# Allegro board PE100_R11_Board_source_file.brd
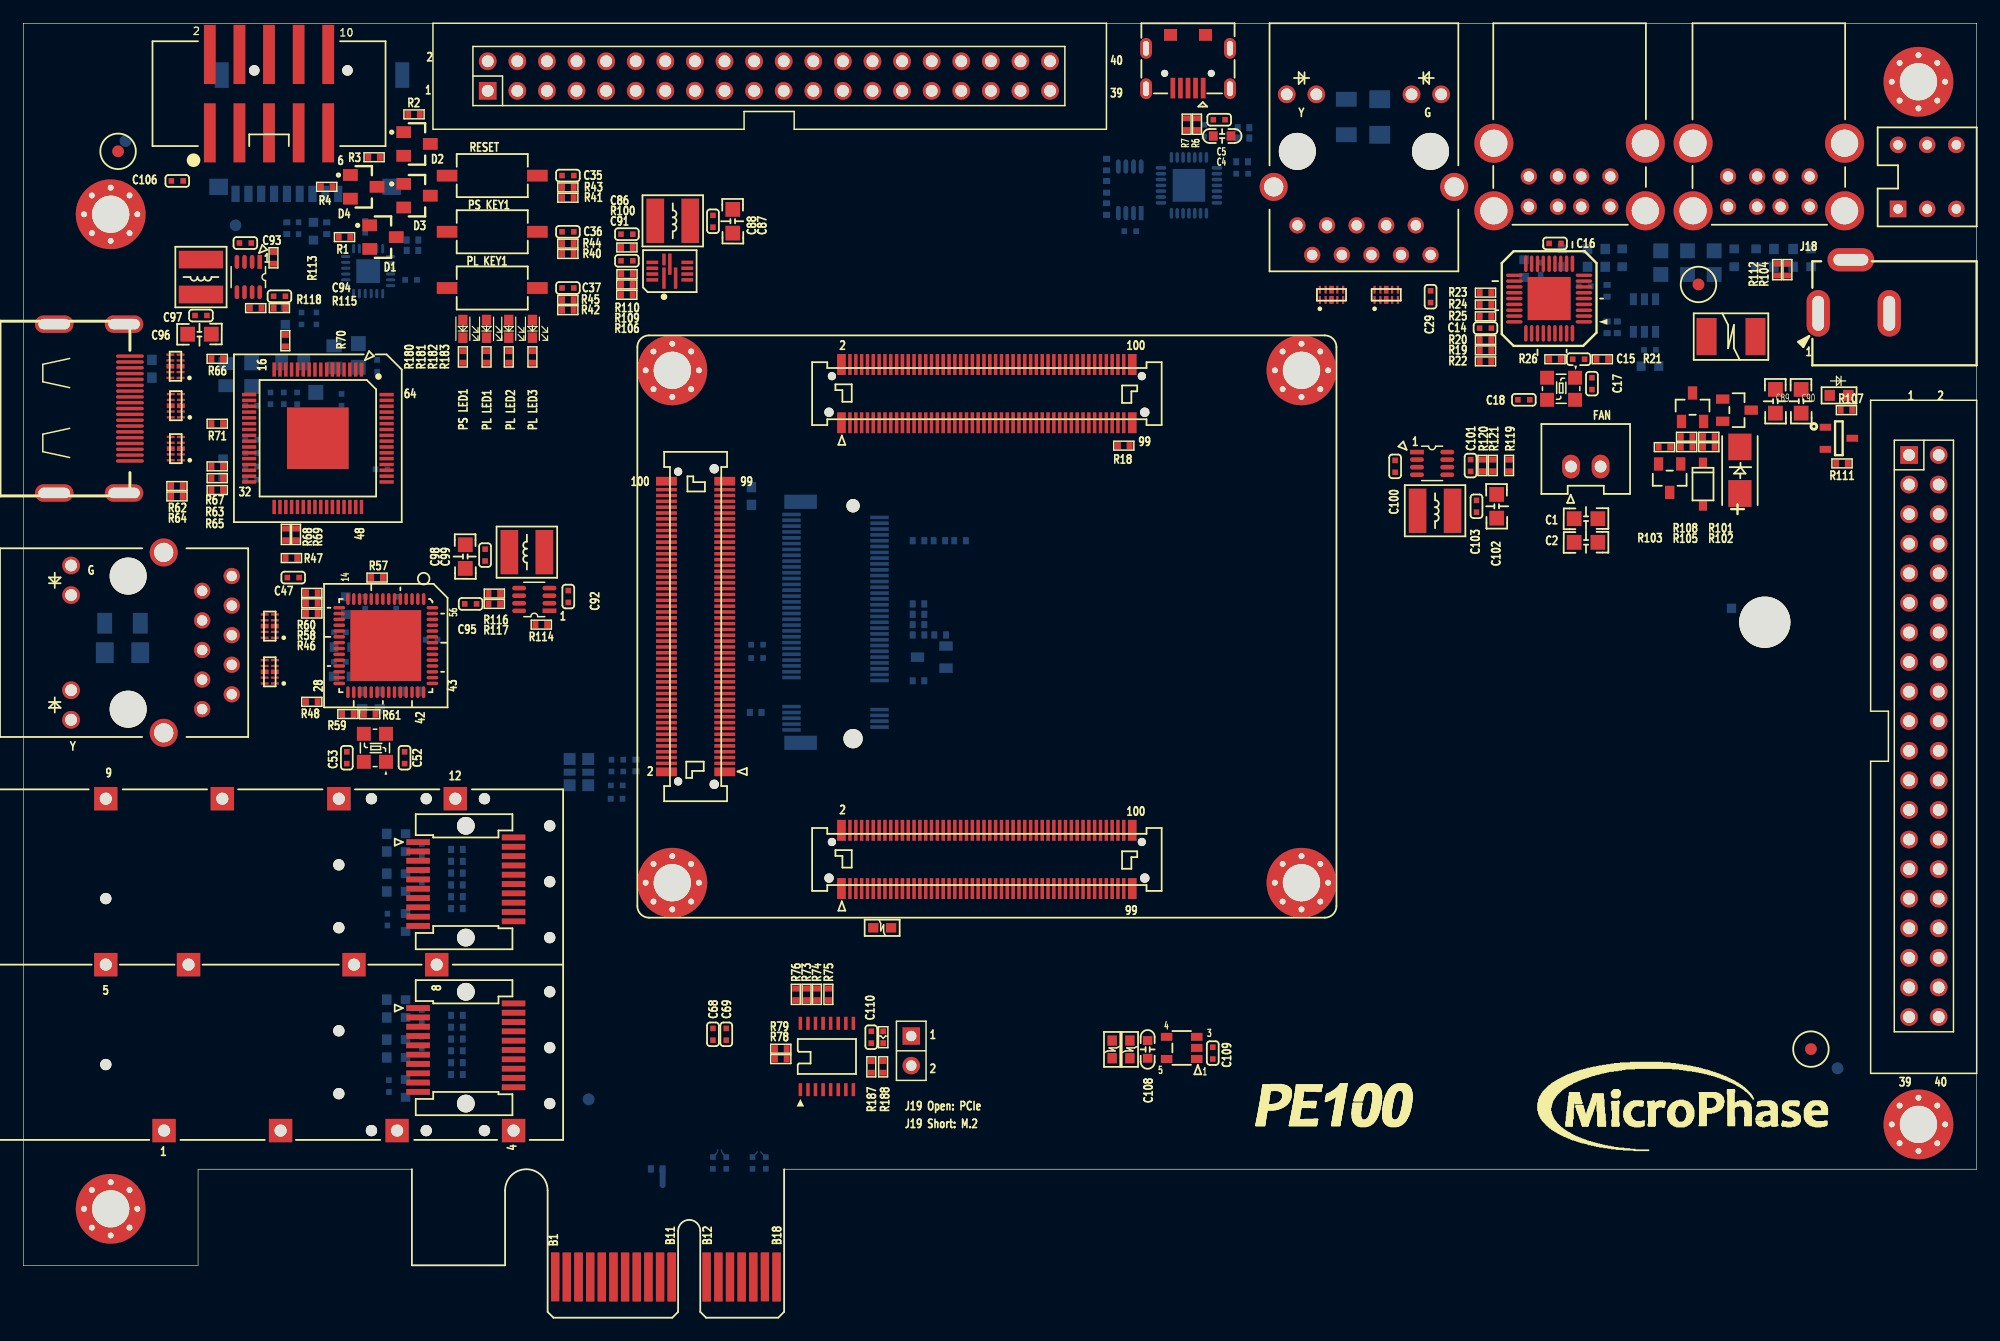
[diagram p0: board, top side]
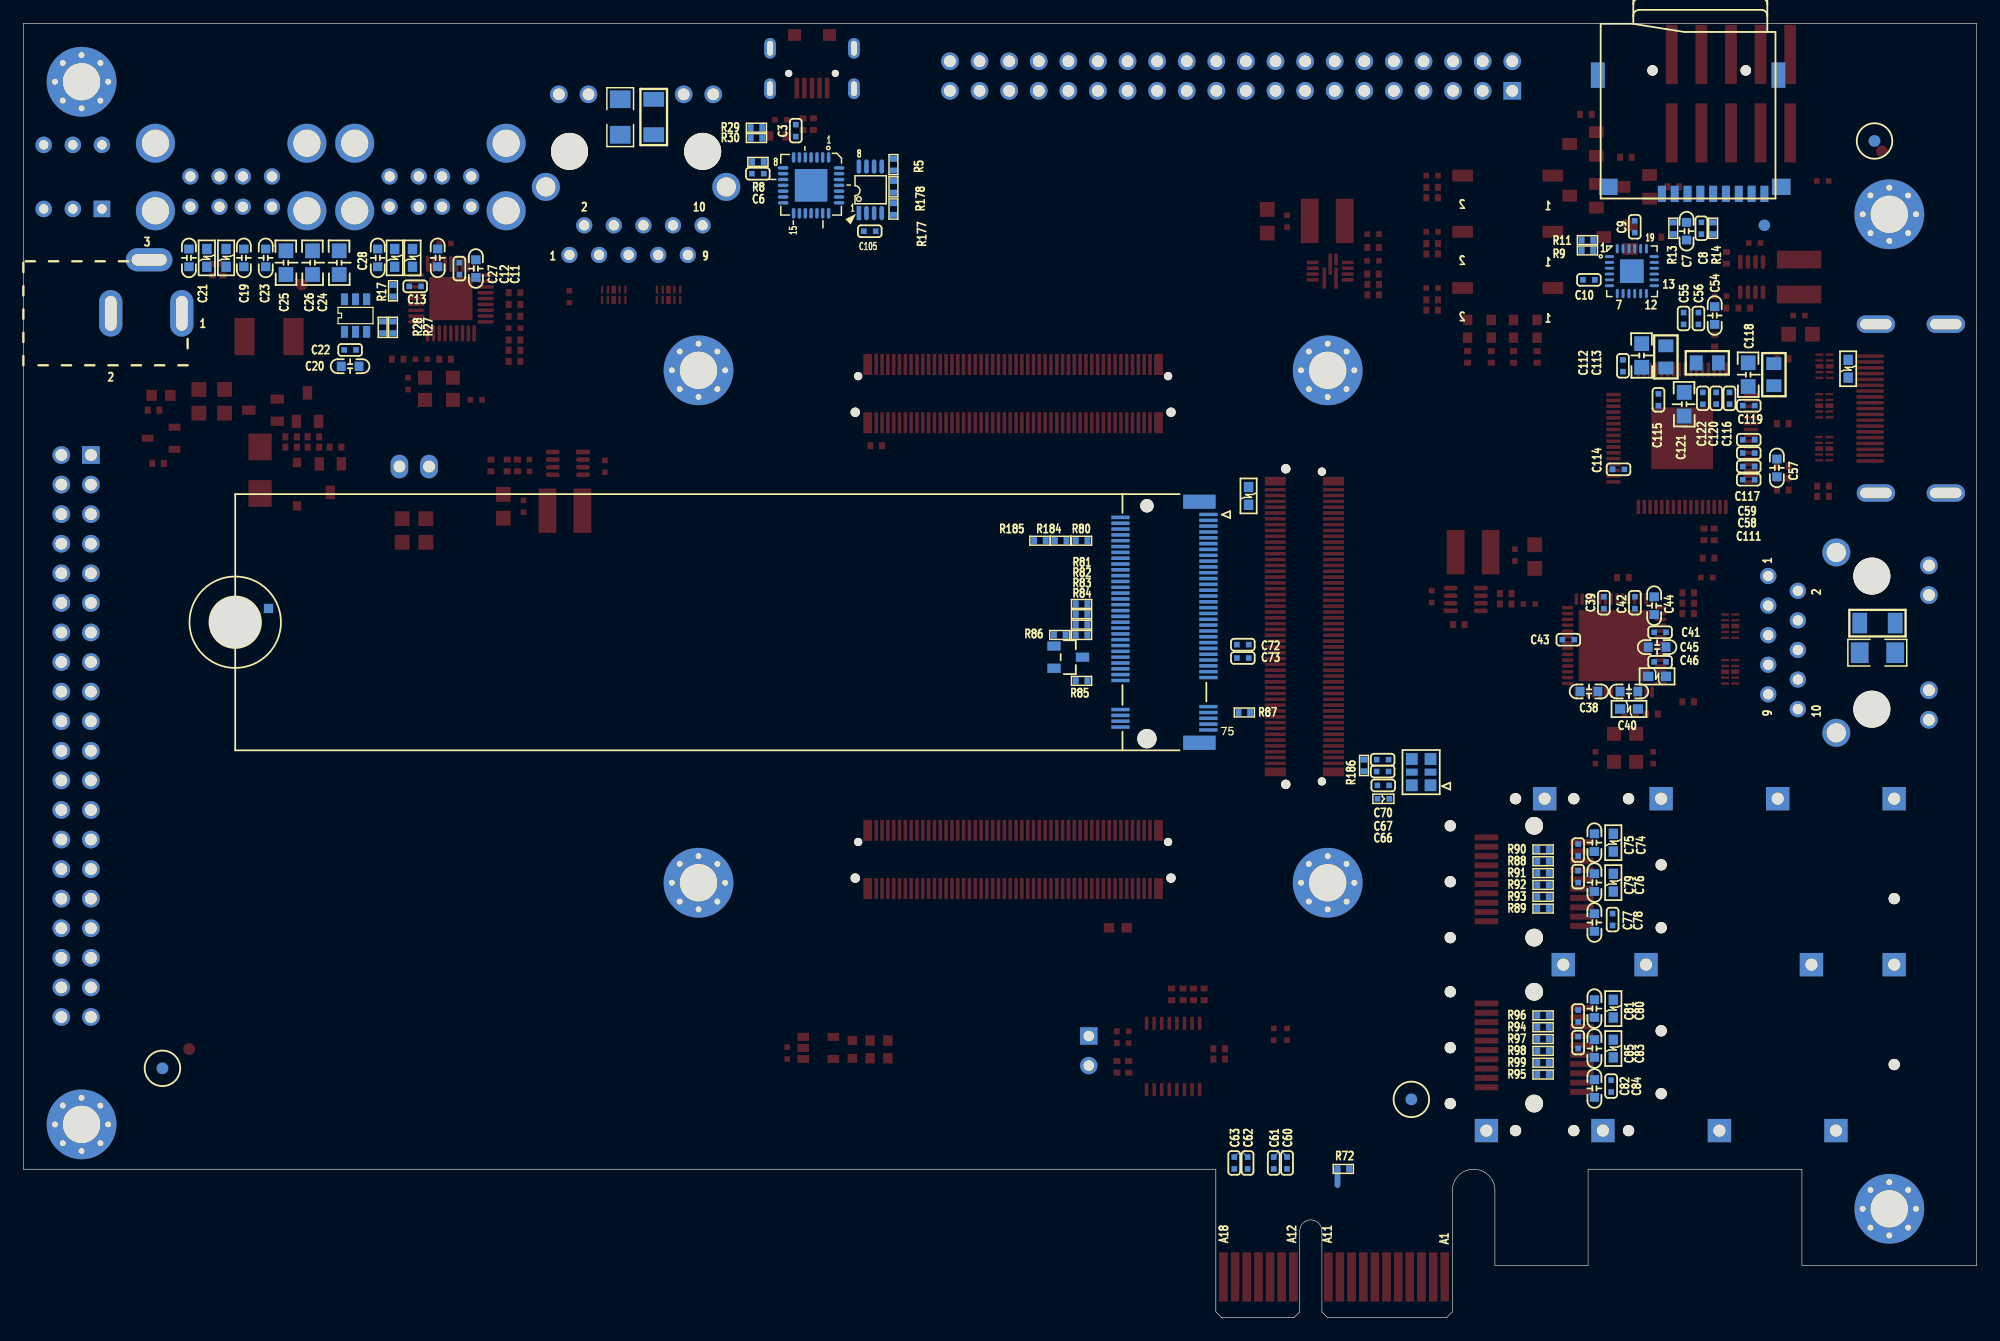
[diagram p1: board, bottom side, seen from below]

Outline 167.65 x 111.15 mm; copper layers: TOP, GND02, VCC03, BOTTOM. Coordinates in mm from the lower left corner of the outline.
Outline path: 0,111.15 0,4.5 15,4.5 15,12.75 33.35,12.75 33.35,4.5 41.35,4.5 41.35,10.93 arc(43.18,12.75) 45,10.93 45,0.5 45.5,0 55.7,0 56.2,0.5 56.2,7.45 arc(57.15,8.4) 58.1,7.45 58.1,0.5 58.6,0 64.79,0 65.3,0.51 65.3,12.75 167.65,12.75 167.65,111.15 0,111.15

## Design rules (mm)
net group CLK: nets PCIE_RX_N PCIE_RX_P
net group DIFFPAIR8: nets N18052822 N18052826
net group DIFFPAIR9: nets USB2UART_DM USB2UART_DP
net group DIFFPAIR13: nets M22FPGA_0_N M22FPGA_0_P
net group FPGA2M2_0_AC_N: nets FPGA2M2_0_AC_N FPGA2M2_0_N
net group FPGA2M2_0_AC_P: nets FPGA2M2_0_AC_P FPGA2M2_0_P
net group M2_REFCLK_N: nets M2_REFCLK_N N18483479
net group M2_REFCLK_P: nets M2_REFCLK_P N18483477
net group MGT_CLK1_N: nets MGT_CLK1_N N18236386
net group MGT_CLK1_P: nets MGT_CLK1_P N18236382
net group N18081884: nets N18081884 N18081899
net group PCIE_TX_CN: nets PCIE_TX_CN PCIE_TX_N
net group PCIE_TX_CP: nets PCIE_TX_CP PCIE_TX_P
net group XADC_V: nets XADC_VN XADC_VP
net group CLK_CP: nets CLK_CP N18488589 N18488615 PCIE_CLK_P
net group CLK_N: nets CLK_N N18488591 N18488617 PCIE_CLK_N
net group DIFF-LOCAL: nets ETH0_MDI0_N ETH0_MDI0_P ETH0_MDI1_N ETH0_MDI1_P ETH0_MDI2_N ETH0_MDI2_P ETH0_MDI3_N ETH0_MDI3_P ETH1_MDI0_N ETH1_MDI0_P ETH1_MDI1_N ETH1_MDI1_P ETH1_MDI2_N ETH1_MDI2_P ETH1_MDI3_N ETH1_MDI3_P GPIO1_0N GPIO1_0P GPIO1_1N GPIO1_1P GPIO1_2N GPIO1_2P GPIO1_3N GPIO1_3P GPIO1_4N GPIO1_4P GPIO1_5N GPIO1_5P GPIO1_6N GPIO1_6P GPIO1_7N GPIO1_7P GPIO1_8N GPIO1_8P GPIO1_9N GPIO1_9P GPIO1_10N GPIO1_10P GPIO1_11N GPIO1_11P GPIO1_12N GPIO1_12P GPIO1_13N GPIO1_13P GPIO1_14N GPIO1_14P GPIO1_15N GPIO1_15P GPIO1_16N GPIO1_16P GPIO1_17N GPIO1_17P GPIO2_0N GPIO2_0P GPIO2_1N GPIO2_1P GPIO2_2N GPIO2_2P GPIO2_3N GPIO2_3P GPIO2_4N GPIO2_4P GPIO2_5N GPIO2_5P GPIO2_6N GPIO2_6P GPIO2_7N GPIO2_7P GPIO2_8N GPIO2_8P GPIO2_9N GPIO2_9P GPIO2_10N GPIO2_10P GPIO2_11N GPIO2_11P GPIO2_12N GPIO2_12P GPIO2_13N GPIO2_13P GPIO2_14N GPIO2_14P GPIO2_15N GPIO2_15P GPIO2_16N GPIO2_16P GPIO2_17N GPIO2_17P N18054871 N18054877 N18054879 N18054885 N18054887 N18054897 N18054907 N18054909 SFP1_RX_N SFP1_RX_P SFP1_TX_N SFP1_TX_P SFP2_RX_N SFP2_RX_P SFP2_TX_N SFP2_TX_P TMDS_TX0_N TMDS_TX0_P TMDS_TX1_N TMDS_TX1_P TMDS_TX2_N TMDS_TX2_P TMDS_TXC_N TMDS_TXC_P USB_OTG_N USB_OTG_P

## Placement (name value [footprint] x y rotation side)
B1  BLM18PG121SN1D  [0603L]  93.45 23.04 90 top
B2  BLM18PG121SN1D  [0603L]  73.71 33.48 180 top
B3  BLM18PG121SN1D  [0603L]  62.49 70.56 270 bottom
B4  BLM18PG121SN1D  [0603L]  150.25 91.01 90 bottom
B5  BLM18PG121SN1D  [0603L]  151.9 91.01 90 bottom
B6  BLM18PG121SN1D  [0603L]  134.25 91.01 90 bottom
B7  BLM18PG121SN1D  [0603L]  135.77 91.01 90 bottom
B8  BLM18PG121SN1D  [0603L]  29.84 52.28 180 bottom
B9  BLM18PG121SN1D  [0603L]  27.43 55.07 0 bottom
B12  BLM15AX601SN1D  [0402L]  73.8 24.09 90 top
B13  BLM15AX601SN1D  [0402L]  50.92 44.56 0 bottom
B14  BLM18PG121SN1D  [0603L]  31.19 40.79 90 bottom
B15  BLM18PG121SN1D  [0603L]  31.19 37.36 270 bottom
B16  BLM18PG121SN1D  [0603L]  31.19 26.54 90 bottom
B17  BLM18PG121SN1D  [0603L]  31.19 23.11 270 bottom
B18  BLM18PG121SN1D(NC)  [0603L]  94.97 23.04 90 top
C1  10uF/25V  [0805C]  134.12 68.61 270 top
C2  10uF/25V  [0805C]  134.12 66.58 270 top
C3  0.1uf  [0402C]  101.35 101.93 0 bottom
C4  10uF/10V  [0603C]  102.89 101.47 270 top
C5  0.1uf  [0402C]  102.64 102.87 270 top
C6  0.1uf  [0402C]  104.61 98.23 270 bottom
C7  10uF/6.3V  [0603C]  24.9 93.3 0 bottom
C8  0.1uf  [0402C]  23.63 93.55 0 bottom
C9  0.1uF  [0402C]  29.35 93.68 0 bottom
C10  0.1uF  [0402C]  33.28 89.12 270 bottom
C11  10uF/6.3V  [0603C]  128.81 90.09 180 bottom
C12  0.1uF  [0402C]  130.22 90.09 180 bottom
C13  0.1uF  [0402C]  134.02 88.56 90 bottom
C14  0.1uF  [0402C]  125.49 84.97 270 top
C15  1uF  [0402C]  133.49 82.3 90 top
C16  1uF  [0402C]  131.46 92.25 90 top
C17  12pF  [0402C]  134.63 80.21 0 top
C18  12pF  [0402C]  128.78 78.82 270 top
C19  10uF/10V  [0603C]  148.72 91.01 180 bottom
C20  10uF/10V  [0603C]  139.6 81.7 90 bottom
C21  10uF/10V  [0603C]  153.44 91.01 180 bottom
C22  0.1uF  [0402C]  139.6 83.1 90 bottom
C23  10uF/10V  [0603C]  146.84 91.01 0 bottom
C24  47uF/10V  [0805C]  140.54 90.59 0 bottom
C25  47uF/10V  [0805C]  145.11 90.59 0 bottom
C26  47uF/10V  [0805C]  142.83 90.59 0 bottom
C27  10uF/10V  [0603C]  132.09 91.01 180 bottom
C28  10uF/10V  [0603C]  137.23 91.01 180 bottom
C29  0.1uf  [0402C]  120.78 87.67 0 top
C30  100pF/1000V  [1206C]  116.42 103.1 90 bottom
C35  0.1uF  [0402C]  46.74 98.07 90 top
C36  0.1uF  [0402C]  46.74 93.25 90 top
C37  0.1uF  [0402C]  46.74 88.42 90 top
C38  10uF/6.3V  [0603C]  33.27 53.78 90 bottom
C39  0.1uF  [0402C]  32 61.4 180 bottom
C40  10uF/6.3V  [0603C]  29.84 53.78 90 bottom
C41  0.1uF  [0402C]  27.17 58.86 270 bottom
C42  0.1uF  [0402C]  29.33 61.4 180 bottom
C43  0.1uF  [0402C]  35.05 58.22 90 bottom
C44  10uF/6.3V  [0603C]  27.68 61.14 180 bottom
C45  10uF/6.3V  [0603C]  27.43 57.59 270 bottom
C46  0.1uF  [0402C]  27.17 56.32 270 bottom
C47  0.1uf  [0402C]  23.17 63.55 90 top
C52  12pF  [0402C]  32.72 48.08 180 top
C53  12pF  [0402C]  27.77 48.08 0 top
C54  47uF/6.3V  [0603C]  22.49 86.06 0 bottom
C55  0.1uF  [0402C]  25.15 85.8 0 bottom
C56  0.1uF  [0402C]  23.88 85.8 0 bottom
C57  10uF/6.3V  [0603C]  17.15 72.98 180 bottom
C58  0.1uF  [0402C]  19.56 73.09 270 bottom
C59  0.1uF  [0402C]  19.56 74.25 270 bottom
C60  0.1uF  [0402C]  59.19 13.29 180 bottom
C61  0.1uF  [0402C]  60.33 13.29 180 bottom
C62  0.1uF  [0402C]  62.58 13.29 180 bottom
C63  0.1uF  [0402C]  63.72 13.29 180 bottom
C66  1uF  [0402C]  50.93 45.71 270 bottom
C67  0.1uF  [0402C]  50.98 46.9 90 bottom
C68  0.1uF  [0402C]  59.19 24.34 0 top
C69  0.1uF  [0402C]  60.33 24.34 0 top
C70  0.1uF  [0402C]  50.98 47.92 90 bottom
C72  0.1uF  [0402C]  62.98 57.79 90 bottom
C73  0.1uF  [0402C]  62.98 56.65 90 bottom
C74  10uF/6.3V  [0603C]  32.81 40.79 0 bottom
C75  0.1uF  [0402C]  34.21 40.16 0 bottom
C76  10uF/6.3V  [0603C]  32.81 37.36 180 bottom
C77  10uF/6.3V  [0603C]  32.81 33.94 180 bottom
C78  0.1uF  [0402C]  31.25 34.19 180 bottom
C79  0.1uF  [0402C]  34.21 37.87 180 bottom
C80  10uF/6.3V  [0603C]  32.81 26.54 0 bottom
C81  0.1uF  [0402C]  34.21 25.91 0 bottom
C82  10uF/6.3V  [0603C]  32.81 19.69 180 bottom
C83  10uF/6.3V  [0603C]  32.81 23.11 180 bottom
C84  0.1uF  [0402C]  31.38 19.89 180 bottom
C85  0.1uF  [0402C]  34.21 23.62 180 bottom
C86  0.1uF  [0402C]  51.8 93.04 270 top
C87  47uF/10V  [0805C]  60.89 94.15 0 top
C88  0.1uF  [0402C]  59.19 94.15 0 top
C89  10uF/25V  [0805C]  150.37 78.69 0 top
C90  10uF/25V  [0805C]  152.58 78.69 0 top
C91  0.1uF  [0402C]  51.8 90.76 270 top
C92  0.1uF  [0402C]  46.77 61.93 0 top
C93  0.1uF  [0402C]  19.06 92.28 90 top
C94  15pF  [0402C]  21.99 87.71 270 top
C95  15pF  [0402C]  38.39 61.29 90 top
C96  47uF/6.3V  [0805C]  15.12 84.45 90 top
C97  0.1uF  [0402C]  15.25 86.06 90 top
C98  47uF/6.3V  [0805C]  37.93 65.36 0 top
C99  0.1uF  [0402C]  39.63 65.48 0 top
C100  0.1uF  [0402C]  117.74 73.1 180 top
C101  15pF  [0402C]  124.21 73.18 180 top
C102  47uF/6.3V  [0805C]  126.45 69.67 180 top
C103  0.1uF  [0402C]  124.72 69.67 180 top
C104  100pF/1000V  [1206C]  8.52 57.1 180 bottom
C105  0.1uF  [0402C]  95 93.3 270 bottom
C106  0.1uF  [0402C]  13.21 97.61 270 top
C108  10uF/6.3V  [0603C]  96.5 23.04 180 top
C109  0.1uF  [0402C]  102.09 22.72 180 top
C110  0.1uF  [0402C]  72.78 24.09 180 top
C111  0.1uF  [0402C]  19.56 71.96 90 bottom
C112  0.1uF  [0402C]  30.36 81.74 0 bottom
C113  47uF/6.3V  [0805C]  28.76 82.63 0 bottom
C114  0.1uF  [0402C]  30.74 72.85 90 bottom
C115  0.1uF  [0402C]  27.31 78.82 180 bottom
C116  0.1uF  [0402C]  21.22 78.95 180 bottom
C117  0.1uF  [0402C]  19.56 75.39 270 bottom
C118  47uF/6.3V  [0805C]  19.61 80.98 0 bottom
C119  0.1uF  [0402C]  19.56 78.31 270 bottom
C120  0.1uF  [0402C]  22.36 78.95 180 bottom
C121  47uF/6.3V  [0805C]  25.11 78.44 180 bottom
C122  0.1uF  [0402C]  23.5 78.95 180 bottom
D1  BAT54S/SOT  [SOT23-236AB]  30.87 92.79 270 top
D2  BAT54S/SOT  [SOT23-236AB]  33.79 100.79 270 top
D3  BAT54S/SOT  [SOT23-236AB]  33.79 96.34 270 top
D4  BAT54S/SOT  [SOT23-236AB]  29.22 97.11 270 top
D5  SS36  [SMA]  147.33 72.77 90 top
D6  RED_LED  [0603LED_AK]  155.84 79.2 180 top
D7  BZX84C13  [SOD123_AK]  144.16 71.58 270 top
D8  GREEN_LED  [0603LED]  37.73 84.91 270 top
D9  GREEN_LED  [0603LED]  39.76 84.91 270 top
D10  GREEN_LED  [0603LED]  41.66 84.91 270 top
D11  GREEN_LED  [0603LED]  43.69 84.91 270 top
F1  2A  [1812F]  146.56 84.25 180 top
F2  SMD0603-050  [0603F]  11.03 81.49 270 bottom
J2  JTAG  [DC3_10P_2P54MM_SM]  21.09 105.11 270 top
J3  CON2  [XH2_1X2_2P54MM]  134.1 73.09 270 top
J4  USB_MicroType  [USBMICRO_H]  99.96 105.59 180 top
J5  MicroSD  [TF-15-15B]  24.77 103.6 0 bottom
J6  DUAL USB  [USB_TPYEA_DUAL]  149.81 96.7 270 top
J7  DUAL USB  [USB_TPYEA_DUAL]  132.71 96.7 270 top
J8  HR911130A  [RJ45_HR911130A]  115.06 100.15 0 top
J9  HR911130A  [RJ45_HR911130A]  9 57.97 90 top
J10  HDMI  [HDMI19S]  9.15 78.07 270 top
J11  M.2 Key M Socket 2/3  2280  [M2_KEY_M_SOCKET]  69.71 59.72 0 bottom
J12  SPF CONNECTOR  [1367073-1]  37.98 37.24 0 top
J13  SFP CAGE  [SFPX2_CASE]  -4.42 16.07 90 top
J14  SPF CONNECTOR  [1367073-1]  37.98 22.99 0 top
J15  CON40A  [IDC40-2_54A]  163.12 49.95 270 top
J16  CON40A  [IDC40-2_54A]  63.99 106.62 0 top
J18  DC_JACK  [DC_0050]  160.15 86.25 0 top
J19  CON2  [SIP2-2P54]  76.21 22.92 270 top
JM1  CON50x2 REC  [QT51A01-38200-7H]  82.7 39.35 90 top
JM2  CON50x2 REC  [QT51A01-38200-7H]  57.7 59.35 180 top
JM3  CON50x2 REC  [QT51A01-38200-7H]  82.7 79.35 90 top
K1  SW_2P  [SW2_3X6]  40.25 98.07 0 top
K2  SW_2P  [SW2_3X6]  40.25 93.25 0 top
K3  SW_2P  [SW2_3X6]  40.25 88.42 0 top
L1  1.5uH  [L4020]  55.74 94.19 0 top
L2  1uH  [L4020]  43.22 65.74 180 top
L3  1uH  [L4020]  15.25 89.36 270 top
L4  1uH  [L4020]  121.17 69.29 0 top
L9  10uH  [L0805]  23.12 81.99 180 bottom
L10  10uH  [L0805]  26.68 82.5 90 bottom
L11  10uH  [L0805]  17.41 80.98 90 bottom
M1  Hole  [HOLE32CIR60]  109.7 37.35 180 bottom
M2  Hole  [HOLE32CIR60]  109.7 81.35 0 top
M3  Hole  [HOLE32CIR60]  55.7 37.35 0 top
M4  Hole  [HOLE32CIR60]  55.7 81.35 0 top
M5  Hole  [HOLE32CIR60]  7.5 94.75 0 top
M6  Hole  [HOLE32CIR60]  7.5 9.35 0 top
M7  Hole  [HOLE32CIR60]  162.65 106.13 0 top
M8  Hole  [HOLE32CIR60]  162.65 16.6 0 top
M9  SPACER_6MM_ROUND  [HOLE173NH-TOP]  149.46 59.72 270 bottom
NOREF  -  []  102.44 95.73 90 top
NOREF#2  -  []  165.9 95.21 90 top
NOREF#3  -  []  102.44 95.73 90 top
NOREF#4  -  []  160.9 95.21 0 top
NOREF#5  -  []  66.69 19.58 0 top
NOREF#6  -  []  160.9 95.21 0 top
NOREF#7  -  []  93.98 94.85 0 top
NOREF#8  -  []  159.15 85.21 0 top
NOREF#9  -  []  101.54 94.83 90 top
NOREF#10  -  []  144.46 84.25 0 top
NOREF#11  -  []  93.98 94.85 90 top
NOREF#12  -  []  97.64 95.73 90 top
NOREF#13  -  []  93.98 94.85 0 top
NOREF#14  -  []  71.24 19.58 90 top
NOREF#15  -  [unnamed#2]  8.13 100.15 0 top
NOREF#16  -  [unnamed#2]  153.42 23.06 0 top
NOREF#17  -  []  70.59 19.58 0 top
NOREF#18  -  []  159.15 85.21 90 top
NOREF#19  -  [unnamed#2]  143.77 88.72 0 top
NOREF#20  -  [unnamed#2]  48.52 18.75 180 bottom
NOREF#21  -  [unnamed#2]  8.77 101.04 180 bottom
NOREF#22  -  [unnamed#2]  155.71 21.41 180 bottom
Q1  WNM2021-3TR  [AO3415]  77.97 56.72 270 bottom
Q2  -  [AO3415]  143.26 78.18 0 top
Q3  -  [AO3415]  147.07 77.93 270 top
Q4  MMBTA92LT1G  [SOT23-3]  141.3 72.09 180 top
Q5  MMBT5551  [SOT23]  155.82 75.52 0 top
R1  0R  [0402R]  27.57 92.79 180 top
R2  0R  [0402R]  33.53 103.33 180 top
R3  0R  [0402R]  30.11 99.65 180 top
R4  0R  [0402R]  26.04 97.11 180 top
R5  4.7K  [0402R]  92.97 99.01 270 bottom
R6  33R  [0402R]  100.73 102.49 270 top
R7  33R  [0402R]  99.84 102.49 270 top
R8  4.7K  [0402R]  104.6 99.25 180 bottom
R9  4.7K(NC)  [0402R]  33.41 91.65 0 bottom
R11  4.7K  [0402R]  33.41 92.53 180 bottom
R13  4.7K  [0402R]  26.04 93.55 270 bottom
R14  4.7K(NC)  [0402R]  22.62 93.55 270 bottom
R17  10K  [0402R]  135.92 88.18 270 bottom
R18  10K  [0402R]  94.45 74.88 180 top
R19  10K  [0402R]  125.49 83.07 180 top
R20  10K  [0402R]  125.49 83.96 180 top
R21  12K 1%  [0402R]  135.52 82.3 0 top
R22  10K  [0402R]  125.49 82.12 180 top
R23  10K  [0402R]  125.49 88.02 180 top
R24  10K  [0402R]  125.49 87 180 top
R25  10K  [0402R]  125.49 85.99 180 top
R26  10M(NC)  [0402R]  131.45 82.3 180 top
R27  100K  [0402R]  135.92 85.04 270 bottom
R28  100K  [0402R]  136.81 85.04 90 bottom
R29  330R  [0402R]  104.73 102.19 180 bottom
R30  330R  [0402R]  104.73 101.3 180 bottom
R39  1M  [1206R]  113.54 103.1 270 bottom
R40  10K  [0402R]  46.74 91.34 180 top
R41  10K  [0402R]  46.74 96.17 180 top
R42  10K  [0402R]  46.74 86.52 180 top
R43  330R  [0402R]  46.74 97.06 180 top
R44  330R  [0402R]  46.74 92.23 180 top
R45  330R  [0402R]  46.74 87.4 180 top
R46  4.7K  [0402R]  24.76 60.46 0 top
R47  330R  [0402R]  23.01 65.23 0 top
R48  330R  [0402R]  24.76 52.89 0 top
R57  4.7K  [0402R]  30.36 63.55 0 top
R58  0R  [0402R]  24.76 61.35 0 top
R59  4.99K 1%  [0402R]  27.86 51.84 0 top
R60  0R(NC)  [0402R]  24.76 62.24 0 top
R61  10M(NC)  [0402R]  29.73 51.82 180 top
R62  2K  [0402R]  13.19 71.41 180 top
R63  0R  [0402R]  16.64 72.09 0 top
R64  2K  [0402R]  13.19 70.52 180 top
R65  0R  [0402R]  16.64 71.07 0 top
R66  10K  [0402R]  16.64 82.34 180 top
R67  2K  [0402R]  16.64 73.1 0 top
R68  4.7K  [0402R]  22.53 67.26 90 top
R69  4.7K  [0402R]  23.41 67.26 90 top
R70  887R 1%  [0402R]  22.49 83.9 90 top
R71  10K  [0402R]  16.64 76.77 0 top
R72  DNI  [0402R]  54.36 12.78 0 bottom
R73  22R  [0402R]  67.22 27.76 90 top
R74  22R  [0402R]  68.11 27.76 90 top
R75  49R9  [0402R]  69.09 27.76 270 top
R76  49R9  [0402R]  66.3 27.76 270 top
R78  0R  [0402R]  65.01 22.21 0 top
R79  0R  [0402R]  65.01 23.1 0 top
R80  10K  [0402R]  76.83 66.72 0 bottom
R81  10K  [0402R]  76.83 61.29 0 bottom
R82  10K  [0402R]  76.83 60.4 0 bottom
R83  10K  [0402R]  76.83 59.51 0 bottom
R84  10K  [0402R]  76.83 58.63 0 bottom
R85  10K  [0402R]  76.83 54.69 0 bottom
R86  10K  [0402R]  78.69 58.63 0 bottom
R87  10K  [0402R]  62.86 51.97 180 bottom
R88  10K  [0402R]  37.22 39.19 0 bottom
R89  10K  [0402R]  37.22 35.13 0 bottom
R90  10K  [0402R]  37.22 40.21 0 bottom
R91  10K  [0402R]  37.22 38.18 0 bottom
R92  10K  [0402R]  37.22 37.16 0 bottom
R93  10K  [0402R]  37.22 36.15 0 bottom
R94  10K  [0402R]  37.22 24.94 0 bottom
R95  10K  [0402R]  37.22 20.88 0 bottom
R96  10K  [0402R]  37.22 25.96 0 bottom
R97  10K  [0402R]  37.22 23.93 0 bottom
R98  10K  [0402R]  37.22 22.91 0 bottom
R99  10K  [0402R]  37.22 21.9 0 bottom
R100  3R3  [0402R]  51.8 91.9 180 top
R101  30K  [0402R]  144.66 75.64 180 top
R102  330R  [0402R]  144.66 74.75 180 top
R103  4.7K  [0402R]  140.85 74.75 180 top
R104  0R(NC)  [0402R]  151.41 89.99 270 top
R105  10K  [0402R]  142.75 74.75 180 top
R106  100K  [0402R]  51.8 87.84 0 top
R107  2K  [0402R]  156.47 77.93 0 top
R108  30K  [0402R]  142.75 75.64 180 top
R109  33K  [0402R]  51.8 88.72 180 top
R110  4.7K  [0402R]  51.81 89.61 180 top
R111  10K  [0402R]  156.09 73.36 180 top
R112  10K  [0402R]  150.52 89.99 270 top
R113  4.7K  [0402R]  21.47 91.01 90 top
R114  4.7K  [0402R]  44.46 59.51 0 top
R115  20K 1%  [0402R]  21.98 86.69 0 top
R116  6.8K 1%  [0402R]  40.42 62.18 180 top
R117  10K 1%  [0402R]  40.42 61.29 0 top
R118  10K 1%  [0402R]  19.95 86.69 0 top
R119  4.7K  [0402R]  127.51 73.18 270 top
R120  45.3K 1%  [0402R]  125.23 73.18 270 top
R121  10K 1%  [0402R]  126.12 73.18 90 top
R177  0R(NC)  [0402R]  92.97 95.2 270 bottom
R178  0R(NC)  [0402R]  92.97 97.11 90 bottom
R179  1M  [1206R]  8.52 59.64 0 bottom
R180  330R  [0402R]  37.73 82.5 90 top
R181  330R  [0402R]  39.76 82.5 90 top
R182  330R  [0402R]  41.66 82.5 90 top
R183  330R  [0402R]  43.69 82.5 90 top
R184  0R  [0402R]  78.62 66.72 0 bottom
R185  0R(NC)  [0402R]  80.4 66.72 0 bottom
R186  100R 1%  [0402R]  52.58 47.42 270 bottom
R187  2K  [0402R]  72.78 21.54 270 top
R188  2K  [0402R]  73.79 21.54 90 top
SW2  SW  [SW6-2P5-5P5]  163.4 97.96 0 top
TP1  TP_R  [TP4]  18.22 93.8 0 bottom
U1  CP2102  [QFN28-0P5-5X5]  100.04 97.23 270 bottom
U2  TXS0102DCTR  [SOP8-0P65-2X4]  94.96 96.85 180 bottom
U3  TXS02612RTWR  [QFN24-0P5-4X4]  29.6 89.87 180 bottom
U4  USB2514  [QFN36-0P5-6X6]  130.95 87.51 180 top
U5  TPS2553DBV  [SOT23-6]  139.14 86.05 90 bottom
U6  88E1512  [QFN56-0P5-8X8TS]  31.11 57.71 270 top
U7  ADV7513  [QFP64_10X10_0P5_T]  25.28 75.52 270 top
U10  TPD4E05U06  [ESD_0524P]  13.06 81.7 90 top
U11  PCIE_Bracket_X1  [PCIX-1PORT]  45.65 5.25 0 top
U12  DSC557-0334SI0  [TSSOP16-0P65-173]  68.97 22.43 0 top
U13  OSC_DIFF  [TCXO3225_6P]  47.68 46.85 0 bottom
U15  -  [NB679]  55.49 89.87 180 top
U16  MP2143DJ  [SOT23-8]  43.85 61.67 90 top
U17  MP2143DJ  [SOT23-8]  19.31 89.36 180 top
U18  MP2143DJ  [SOT23-8]  120.91 73.36 270 top
U19  TPD4E05U06  [ESD_0524P]  112.27 87.84 0 top
U20  TPD4E05U06  [ESD_0524P]  116.97 87.84 0 top
U21  TPD4E05U06  [ESD_0524P]  21.15 55.46 90 top
U22  TPD4E05U06  [ESD_0524P]  21.15 59.39 90 top
U23  SPX3819M5-X-X(NC)  [SOT-23]  99.42 23.16 90 top
U28  TPD4E05U06  [ESD_0524P]  13.09 78.31 90 top
U29  TPD4E05U06  [ESD_0524P]  13.09 74.63 90 top
Y1  24M  [XTAL3225M]  131.98 79.76 180 top
Y2  25M  [XTAL3225M]  30.18 48.93 90 top

## Library data of the parts
B1-B9 B12-B18 = BEAD
C1 C2 C11 C15-C21 C23-C28 C30 C38 C40 C44 C45 C52-C54 C57 C66 C74 C76 C77 C80 C82 C83 C87 C94-C96 C98 C101 C102 C104 C108 C110-C122 = CAP
C3-C8 C29 C47 C89 C90 = C
C9 C10 C12-C14 C22 C35-C37 C39 C41-C43 C46 C55 C56 C58-C63 C67-C70 C72 C73 C75 C78 C79 C81 C84-C86 C88 C91-C93 C97 C99 C100 C103 C105 C106 C109 = CAP: signal model: CAP_0402C_0.1UF_0.1uF
D1-D4 = BAT54S/SOT
D5 = DIODE
D6 D8-D11 = LED
D7 = TVS_SMAJ5_0.0CA_5V: Tolerance: *; User Part Number: *
F1 F2 = FUSE
J2 = CON10A: User Part Number: *; Tolerance: *
J3 = CON2: User Part Number: *; Tolerance: *
J4 = USB_MicroType
J5 = MicroSD_1
J6 J7 = DUAL USB: Tolerance: *; User Part Number: *
J8 J9 = RJ45_HR911130A_2: Tolerance: *; User Part Number: *
J10 = HDMI
J11 = M2_NGFF_Rec: User Part Number: *; Tolerance: *
J12 J14 = SPF CONNECTOR: User Part Number: *; Tolerance: *
J13 = SFP CAGE
J15 J16 = CON40A
J18 = POWER_DC-JACK: Tolerance: ?; User Part Number: *********
J19 = CON2
JM1-JM3 = CON 50x2_1: User Part Number: *; Tolerance: *
K1-K3 = SW_2P
L1-L4 = L: User Part Number: *; Tolerance: *
L9-L11 = L: User Part Number: L0805; Tolerance: ?
M1-M9 TP1 = TP_R
Q1 = WNM2021-3TR
Q2 Q3 = AO3415
Q4 = MMBT5401L_0
Q5 = NPN2
R1-R4 R9 R11 R17-R25 R27 R28 R46 R57-R60 R62-R72 R80-R99 R180-R183 R187 R188 = RESISTOR
R5-R8 R13 R14 R26 R29 R30 R39-R45 R47 R48 R61 R75 R76 R101-R105 R107-R109 R111 R112 R177-R179 = R
R73 R74 = RESISTOR: signal model: RES_0402R_22R_22R
R78 R79 = RES: signal model: RES_0402R_0R(NC)_0R(NC)
R100 R106 R110 R113-R121 R184-R186 = RES
SW2 = SW5
U1 = USB2UART_CP2102
U2 = LevelShift_TXS0102
U3 = LevelShift_TXS02612_SDIO
U4 = USB2514
U5 = TPS2553DBV: User Part Number: *; Tolerance: *
U6 = 88E1512
U7 = ADV7513: User Part Number: *; Tolerance: *
U10 U19-U22 U28 U29 = RCLAMP0564P
U11 = PCIE_Bracket_X1
U12 = DSC557-0334SI0
U13 = OSC_3225_Diff: User Part Number: *; Tolerance: *
U15 = NB679: User Part Number: *; Tolerance: *
U16-U18 = MP2143
U23 = SPX3819M5-2-5
Y1 Y2 = CRYSTAL_4pin

## Footprints (pads in the part's own frame, mm; a bottom-side part is the same pattern mirrored in y, then rotated)
0402C
  rect 0.483x0.483 smd: 1(0,0.508) 2(0,-0.508)
0402L
  rect 0.5x0.5 smd: 1(-0.508,0) 2(0.508,0)
0402R
  rect 0.508x0.61 smd: 1(-0.5,0) 2(0.5,0)
0603C
  rect 0.813x0.762 smd: 1(0,0.762) 2(0,-0.762)
0603F
  rect 0.889x0.813 smd: 1(-0.762,0) 2(0.762,0)
0603L
  rect 0.889x0.813 smd: 1(-0.762,0) 2(0.762,0)
0603LED
  rect 0.9x0.8 smd: A(-0.762,0) K(0.762,0)
0603LED_AK
  rect 0.9x0.95 smd: A(0.8,0) K(-0.8,0)
0805C
  rect 1.27x1.27 smd: 1(0,1.016) 2(0,-1.016)
1206C
  rect 1.524x1.778 smd: 1(-1.524,0) 2(1.524,0)
1206R
  rect 1.27x1.778 smd: 1(-1.524,0) 2(1.524,0)
1812F
  rect 1.727x3.2 smd: 1(-2.1,0) 2(2.1,0)
1367073-1
  round 1.524 hole 1.524 unplated: (0,5) (0,-4.6)
  rect 2.032x0.508 smd: 1(-4.1,3.6) 2(-4.1,2.8) 3(-4.1,2) 4(-4.1,1.2) 5(-4.1,0.4) 6(-4.1,-0.4) 7(-4.1,-1.2) 8(-4.1,-2) 9(-4.1,-2.8) 10(-4.1,-3.6) 11(4.1,-3.2) 12(4.1,-2.4) 13(4.1,-1.6) 14(4.1,-0.8) 15(4.1,0) 16(4.1,0.8) 17(4.1,1.6) 18(4.1,2.4) 19(4.1,3.2) 20(4.1,4)
AO3415
  rect 0.8x1.15 smd: D(0,1.225) G(-0.95,-1.225) S(0.95,-1.225)
DC3_10P_2P54MM_SM
  rect 5.08x1.016 smd: 1(3.37,-5.08) 2(-3.37,-5.08) 3(3.37,-2.54) 4(-3.37,-2.54) 5(3.37,0) 6(-3.37,0) 7(3.37,2.54) 8(-3.37,2.54) 9(3.37,5.08) 10(-3.37,5.08)
DC_0050
  oval 2x4 hole 1x3: 1(-6.1,0) 2(0,0)
  oval 4x2 hole 3x1: 3(-3.3,4.6)
ESD_0524P
  rect 0.2x0.68 smd: 1(-1,-0.44) 2(-0.5,-0.44) 4(0.5,-0.44) 5(1,-0.44) 6(1,0.44) 7(0.5,0.44) 9(-0.5,0.44) 10(-1,0.44)
  rect 0.4x0.68 smd: 3(0,-0.44) 8(0,0.44)
HDMI19S
  oval 0.3x2.4 smd: 1(4.5,0) 2(4,0) 3(3.5,0) 4(3,0) 5(2.5,0) 6(2,0) 7(1.5,0) 8(1,0) 9(0.5,0) 10(0,0) 11(-0.5,0) 12(-1,0) 13(-1.5,0) 14(-2,0) 15(-2.5,0) 16(-3,0) 17(-3.5,0) 18(-4,0) 19(-4.5,0)
  oval 1.5x3.3 hole 0.9x2.7: BO1(7.25,-0.5) BO2(-7.25,-0.5) BO3(7.25,-6.5) BO4(-7.25,-6.5)
HOLE32CIR60
  round 1.016 hole 0.508: (-2.286,0) (-1.617,1.617) (-1.617,-1.617) (0,2.286) (0,-2.286) (1.617,1.617) (1.617,-1.617) (2.286,0)
  round 5.994 hole 3.2: 1(0,0)
HOLE173NH-TOP
  round 4.394 hole 4.394 unplated: (0,0)
  rect 0.8x0.8 smd: 1(-1.187,2.859)
IDC40-2_54A
  rect 1.524x1.524 hole 1.016: 1(-24.13,-1.27)
  round 1.524 hole 1.016: 2(-24.13,1.27) 3(-21.59,-1.27) 4(-21.59,1.27) 5(-19.05,-1.27) 6(-19.05,1.27) 7(-16.51,-1.27) 8(-16.51,1.27) 9(-13.97,-1.27) 10(-13.97,1.27) 11(-11.43,-1.27) 12(-11.43,1.27) 13(-8.89,-1.27) 14(-8.89,1.27) 15(-6.35,-1.27) 16(-6.35,1.27) 17(-3.81,-1.27) 18(-3.81,1.27) 19(-1.27,-1.27) 20(-1.27,1.27) 21(1.27,-1.27) 22(1.27,1.27) 23(3.81,-1.27) 24(3.81,1.27) 25(6.35,-1.27) 26(6.35,1.27) 27(8.89,-1.27) 28(8.89,1.27) 29(11.43,-1.27) 30(11.43,1.27) 31(13.97,-1.27) 32(13.97,1.27) 33(16.51,-1.27) 34(16.51,1.27) 35(19.05,-1.27) 36(19.05,1.27) 37(21.59,-1.27) 38(21.59,1.27) 39(24.13,-1.27) 40(24.13,1.27)
L0805
  rect 1.1x1.3 smd: 1(-0.95,0) 2(0.95,0)
L4020
  rect 1.524x3.81 smd: 1(-1.5,0) 2(1.5,0)
M2_KEY_M_SOCKET
  rect 2.794x1.219 smd: (-3,-10.35) (-3,10.35)
  round 1.143 hole 1.143 unplated: (1.5,-10)
  round 1.651 hole 1.651 unplated: (1.5,10)
  rect 1.575x0.305 smd: 1(-3.775,-9.25) 2(3.775,-9) 3(-3.775,-8.75) 4(3.775,-8.5) 5(-3.775,-8.25) 6(3.775,-8) 7(-3.775,-7.75) 8(3.775,-7.5) 9(-3.775,-7.25) 10(3.775,-7) 11(-3.775,-6.75) 12(3.775,-6.5) 13(-3.775,-6.25) 14(3.775,-6) 15(-3.775,-5.75) 16(3.775,-5.5) 17(-3.775,-5.25) 18(3.775,-5) 19(-3.775,-4.75) 20(3.775,-4.5) 21(-3.775,-4.25) 22(3.775,-4) 23(-3.775,-3.75) 24(3.775,-3.5) 25(-3.775,-3.25) 26(3.775,-3) 27(-3.775,-2.75) 28(3.775,-2.5) 29(-3.775,-2.25) 30(3.775,-2) 31(-3.775,-1.75) 32(3.775,-1.5) 33(-3.775,-1.25) 34(3.775,-1) 35(-3.775,-0.75) 36(3.775,-0.5) 37(-3.775,-0.25) 38(3.775,0) 39(-3.775,0.25) 40(3.775,0.5) 41(-3.775,0.75) 42(3.775,1) 43(-3.775,1.25) 44(3.775,1.5) 45(-3.775,1.75) 46(3.775,2) 47(-3.775,2.25) 48(3.775,2.5) 49(-3.775,2.75) 50(3.775,3) 51(-3.775,3.25) 52(3.775,3.5) 53(-3.775,3.75) 54(3.775,4) 55(-3.775,4.25) 56(3.775,4.5) 57(-3.775,4.75) 58(3.775,5) 67(-3.775,7.25) 68(3.775,7.5) 69(-3.775,7.75) 70(3.775,8) 71(-3.775,8.25) 72(3.775,8.5) 73(-3.775,8.75) 74(3.775,9) 75(-3.775,9.25)
NB679
  rect 0.305x1.829 smd: 1(0.5,0.6) 2(-0.5,0.6) 7(0,-0.6)
  rect 1.016x0.305 smd: 3(-1.5,0.75) 4(-1.5,0.25) 5(-1.5,-0.25) 6(-1.5,-0.75) 9(1.5,-0.75) 10(1.5,-0.25) 11(1.5,0.25) 12(1.5,0.75)
  rect 0.305x1.016 smd: 8(0.5,-1)
PCIX-1PORT
  rect 0.711x3.2 smd: A1(0,0) B17(18,0)
  rect 0.711x4.191 smd: A2(1,0) A3(2,0) A4(3,0) A5(4,0) A6(5,0) A7(6,0) A8(7,0) A9(8,0) A10(9,0) A11(10,0) A12(13,0) A13(14,0) A14(15,0) A15(16,0) A16(17,0) A17(18,0) A18(19,0) B1(0,0) B2(1,0) B3(2,0) B4(3,0) B5(4,0) B6(5,0) B7(6,0) B8(7,0) B9(8,0) B10(9,0) B11(10,0) B12(13,0) B13(14,0) B14(15,0) B15(16,0) B16(17,0) B18(19,0)
QFN24-0P5-4X4
  oval 0.813x0.254 smd: 1(-1.925,1.25) 2(-1.925,0.75) 3(-1.925,0.25) 4(-1.925,-0.25) 5(-1.925,-0.75) 6(-1.925,-1.25) 13(1.925,-1.25) 14(1.925,-0.75) 15(1.925,-0.25) 16(1.925,0.25) 17(1.925,0.75) 18(1.925,1.25)
  oval 0.254x0.813 smd: 7(-1.25,-1.925) 8(-0.75,-1.925) 9(-0.25,-1.925) 10(0.25,-1.925) 11(0.75,-1.925) 12(1.25,-1.925) 19(1.25,1.925) 20(0.75,1.925) 21(0.25,1.925) 22(-0.25,1.925) 23(-0.75,1.925) 24(-1.25,1.925)
  rect 2.032x2.032 smd: 25(0,0)
QFN28-0P5-5X5
  oval 0.914x0.305 smd: 1(-2.4,1.5) 2(-2.4,1.001) 3(-2.4,0.5) 4(-2.4,0.001) 5(-2.4,-0.5) 6(-2.4,-1) 7(-2.4,-1.5) 15(2.4,-1.5) 16(2.4,-1) 17(2.4,-0.5) 18(2.4,0) 19(2.4,0.5) 20(2.4,1.001) 21(2.4,1.5)
  oval 0.305x0.914 smd: 8(-1.5,-2.4) 9(-1,-2.4) 10(-0.5,-2.4) 11(0,-2.4) 12(0.5,-2.4) 13(1,-2.4) 14(1.5,-2.4) 22(1.5,2.4) 23(1,2.4) 24(0.5,2.4) 25(0,2.4) 26(-0.5,2.4) 27(-1,2.4) 28(-1.5,2.4)
  rect 2.8x2.8 smd: 29(0,0)
QFN36-0P5-6X6
  oval 1.422x0.305 smd: 1(-2.987,2) 2(-2.987,1.5) 3(-2.987,1) 4(-2.987,0.5) 5(-2.987,0) 6(-2.987,-0.5) 7(-2.987,-1) 8(-2.987,-1.5) 9(-2.987,-2) 19(2.987,-2) 20(2.987,-1.5) 21(2.987,-1) 22(2.987,-0.5) 23(2.987,0) 24(2.987,0.5) 25(2.987,1) 26(2.987,1.5) 27(2.987,2)
  oval 0.305x1.422 smd: 10(-2,-2.987) 11(-1.5,-2.987) 12(-1,-2.987) 13(-0.5,-2.987) 14(0,-2.987) 15(0.5,-2.987) 16(1,-2.987) 17(1.5,-2.987) 18(2,-2.987) 28(2,2.987) 29(1.5,2.987) 30(1,2.987) 31(0.5,2.987) 32(0,2.987) 33(-0.5,2.987) 34(-1,2.987) 35(-1.5,2.987) 36(-2,2.987)
  rect 3.708x3.708 smd: 37(0,0)
QFN56-0P5-8X8TS
  oval 1.016x0.305 smd: 1(-4,3.25) 2(-4,2.75) 3(-4,2.25) 4(-4,1.75) 5(-4,1.25) 6(-4,0.75) 7(-4,0.25) 8(-4,-0.25) 9(-4,-0.75) 10(-4,-1.25) 11(-4,-1.75) 12(-4,-2.25) 13(-4,-2.75) 14(-4,-3.25) 29(4,-3.25) 30(4,-2.75) 31(4,-2.25) 32(4,-1.75) 33(4,-1.25) 34(4,-0.75) 35(4,-0.25) 36(4,0.25) 37(4,0.75) 38(4,1.25) 39(4,1.75) 40(4,2.25) 41(4,2.75) 42(4,3.25)
  oval 0.305x1.016 smd: 15(-3.25,-4) 16(-2.75,-4) 17(-2.25,-4) 18(-1.75,-4) 19(-1.25,-4) 20(-0.75,-4) 21(-0.25,-4) 22(0.25,-4) 23(0.75,-4) 24(1.25,-4) 25(1.75,-4) 26(2.25,-4) 27(2.75,-4) 28(3.25,-4) 43(3.25,4) 44(2.75,4) 45(2.25,4) 46(1.75,4) 47(1.25,4) 48(0.75,4) 49(0.25,4) 50(-0.25,4) 51(-0.75,4) 52(-1.25,4) 53(-1.75,4) 54(-2.25,4) 55(-2.75,4) 56(-3.25,4)
  rect 6.096x6.096 smd: 57(0,0)
QFP64_10X10_0P5_T
  rect 1.219x0.305 smd: 1(-5.9,3.75) 2(-5.9,3.25) 3(-5.9,2.75) 4(-5.9,2.25) 5(-5.9,1.75) 6(-5.9,1.25) 7(-5.9,0.75) 8(-5.9,0.25) 9(-5.9,-0.25) 10(-5.9,-0.75) 11(-5.9,-1.25) 12(-5.9,-1.75) 13(-5.9,-2.25) 14(-5.9,-2.75) 15(-5.9,-3.25) 16(-5.9,-3.75) 33(5.9,-3.75) 34(5.9,-3.25) 35(5.9,-2.75) 36(5.9,-2.25) 37(5.9,-1.75) 38(5.9,-1.25) 39(5.9,-0.75) 40(5.9,-0.25) 41(5.9,0.25) 42(5.9,0.75) 43(5.9,1.25) 44(5.9,1.75) 45(5.9,2.25) 46(5.9,2.75) 47(5.9,3.25) 48(5.9,3.75)
  rect 0.305x1.219 smd: 17(-3.75,-5.9) 18(-3.25,-5.9) 19(-2.75,-5.9) 20(-2.25,-5.9) 21(-1.75,-5.9) 22(-1.25,-5.9) 23(-0.75,-5.9) 24(-0.25,-5.9) 25(0.25,-5.9) 26(0.75,-5.9) 27(1.25,-5.9) 28(1.75,-5.9) 29(2.25,-5.9) 30(2.75,-5.9) 31(3.25,-5.9) 32(3.75,-5.9) 49(3.75,5.9) 50(3.25,5.9) 51(2.75,5.9) 52(2.25,5.9) 53(1.75,5.9) 54(1.25,5.9) 55(0.75,5.9) 56(0.25,5.9) 57(-0.25,5.9) 58(-0.75,5.9) 59(-1.25,5.9) 60(-1.75,5.9) 61(-2.25,5.9) 62(-2.75,5.9) 63(-3.25,5.9) 64(-3.75,5.9)
  rect 5.3x5.3 smd: 65(0,0)
QT51A01-38200-7H
  round 0.8 hole 0.8 unplated: (-1.6,13.55) (-1.6,-13.55)
  round 0.7 hole 0.7 unplated: (1.5,13.3) (1.5,-13.3)
  rect 1.8x0.75 smd: 1(-2.5,12.479) 2(2.5,12.479) 99(-2.5,-12.479) 100(2.5,-12.479)
  rect 1.8x0.305 smd: 3(-2.5,11.75) 4(2.5,11.75) 5(-2.5,11.25) 6(2.5,11.25) 7(-2.5,10.75) 8(2.5,10.75) 9(-2.5,10.25) 10(2.5,10.25) 11(-2.5,9.75) 12(2.5,9.75) 13(-2.5,9.25) 14(2.5,9.25) 15(-2.5,8.75) 16(2.5,8.75) 17(-2.5,8.25) 18(2.5,8.25) 19(-2.5,7.75) 20(2.5,7.75) 21(-2.5,7.25) 22(2.5,7.25) 23(-2.5,6.75) 24(2.5,6.75) 25(-2.5,6.25) 26(2.5,6.25) 27(-2.5,5.75) 28(2.5,5.75) 29(-2.5,5.25) 30(2.5,5.25) 31(-2.5,4.75) 32(2.5,4.75) 33(-2.5,4.25) 34(2.5,4.25) 35(-2.5,3.75) 36(2.5,3.75) 37(-2.5,3.25) 38(2.5,3.25) 39(-2.5,2.75) 40(2.5,2.75) 41(-2.5,2.25) 42(2.5,2.25) 43(-2.5,1.75) 44(2.5,1.75) 45(-2.5,1.25) 46(2.5,1.25) 47(-2.5,0.75) 48(2.5,0.75) 49(-2.5,0.25) 50(2.5,0.25) 51(-2.5,-0.25) 52(2.5,-0.25) 53(-2.5,-0.75) 54(2.5,-0.75) 55(-2.5,-1.25) 56(2.5,-1.25) 57(-2.5,-1.75) 58(2.5,-1.75) 59(-2.5,-2.25) 60(2.5,-2.25) 61(-2.5,-2.75) 62(2.5,-2.75) 63(-2.5,-3.25) 64(2.5,-3.25) 65(-2.5,-3.75) 66(2.5,-3.75) 67(-2.5,-4.25) 68(2.5,-4.25) 69(-2.5,-4.75) 70(2.5,-4.75) 71(-2.5,-5.25) 72(2.5,-5.25) 73(-2.5,-5.75) 74(2.5,-5.75) 75(-2.5,-6.25) 76(2.5,-6.25) 77(-2.5,-6.75) 78(2.5,-6.75) 79(-2.5,-7.25) 80(2.5,-7.25) 81(-2.5,-7.75) 82(2.5,-7.75) 83(-2.5,-8.25) 84(2.5,-8.25) 85(-2.5,-8.75) 86(2.5,-8.75) 87(-2.5,-9.25) 88(2.5,-9.25) 89(-2.5,-9.75) 90(2.5,-9.75) 91(-2.5,-10.25) 92(2.5,-10.25) 93(-2.5,-10.75) 94(2.5,-10.75) 95(-2.5,-11.25) 96(2.5,-11.25) 97(-2.5,-11.75) 98(2.5,-11.75)
RJ45_HR911130A
  round 3.175 hole 3.175 unplated: (-5.715,0) (5.715,0)
  round 1.397 hole 0.889: 1(5.72,-8.89) 2(4.45,-6.35) 3(3.18,-8.89) 4(1.91,-6.35) 5(0.64,-8.89) 6(-0.63,-6.35) 7(-1.9,-8.89) 8(-3.17,-6.35) 9(-4.44,-8.89) 10(-5.71,-6.35)
  round 1.524 hole 1.016: 11(6.625,4.9) 12(4.085,4.9) 13(-4.085,4.9) 14(-6.625,4.9)
  round 2.413 hole 1.651: 15(7.745,-3.05) 16(-7.745,-3.05)
SFPX2_CASE
  round 0.965 hole 0.965 unplated: (0,-34.3) (0,-39) (0,-44) (2.32,-49.6) (3.17,-31.5) (5.67,-11.5) (7.12,-49.6) (8.57,-31.5) (11.92,-49.6) (16.57,-49.6) (17.42,-31.5) (19.92,-11.5) (21.37,-49.6) (22.82,-31.5) (26.17,-49.6) (28.5,-34.3) (28.5,-39) (28.5,-44)
  rect 2.007x2.007 hole 1.041: 1(0,-16.5) 2(0,-26.5) 3(0,-36.5) 4(0,-46.5) 5(14.25,-11.5) 6(14.25,-18.6) 7(14.25,-32.8) 8(14.25,-39.9) 9(28.5,-11.5) 10(28.5,-21.5) 11(28.5,-31.5) 12(28.5,-41.5)
SIP2-2P54
  rect 1.5x1.5 hole 0.9: 1(-1.27,0)
  round 1.5 hole 0.9: 2(1.27,0)
SMA
  rect 2.3x2 smd: A(-2,0) K(2,0)
SOD123_AK
  rect 0.813x0.711 smd: A(1.875,0) K(-1.875,0)
SOP8-0P65-2X4
  rect 0.406x1.219 smd: 1(-0.98,-2)
  oval 0.406x1.219 smd: 2(-0.33,-2) 3(0.33,-2) 4(0.98,-2) 5(0.98,2) 6(0.33,2) 7(-0.33,2) 8(-0.98,2)
SOT23
  rect 1x0.6 smd: 1(-1.15,0.95) 2(-1.15,-0.95) 3(1.15,0)
SOT23-3
  rect 0.8x1.15 smd: 1(-0.95,-1.225) 2(0.95,-1.225) 3(0,1.225)
SOT23-6
  rect 1.016x0.61 smd: 1(-1.4,0.95) 2(-1.4,0) 3(-1.4,-0.95) 4(1.4,-0.95) 5(1.4,0) 6(1.4,0.95)
SOT23-8
  rect 0.4x1.2 smd: 1(-0.975,-1.3)
  oval 0.4x1.2 smd: 2(-0.325,-1.3) 3(0.325,-1.3) 4(0.975,-1.3) 5(0.975,1.3) 6(0.325,1.3) 7(-0.325,1.3) 8(-0.975,1.3)
SOT23-236AB
  rect 1.016x1.27 smd: 1(-1.016,-1.143) 2(1.016,-1.143) 3(0,1.143)
SOT-23
  rect 0.686x0.991 smd: 1(-0.95,-1.295) 2(0,-1.295) 3(0.95,-1.295) 4(0.95,1.295) 5(-0.95,1.295)
SW2_3X6
  rect 1.778x1.016 smd: 1(-3.875,0) 2(3.875,0)
SW6-2P5-5P5
  rect 1.422x1.422 hole 0.813: 1(-2.5,-2.75)
  round 1.422 hole 0.813: 2(0,-2.75) 3(2.5,-2.75) 4(-2.5,2.75) 5(0,2.75) 6(2.5,2.75)
TCXO3225_6P
  rect 1.016x1.016 smd: 1(-0.8,1.125) 3(-0.8,-1.125) 4(0.8,-1.125) 6(0.8,1.125)
  rect 1.016x0.61 smd: 2(-0.8,0) 5(0.8,0)
TF-15-15B
  round 0.9 hole 0.9 unplated: (-4.95,-3.5) (3.05,-3.5)
  rect 0.7x1.4 smd: 1(2.25,7.1) 2(1.15,7.1) 3(0.05,7.1) 4(-1.05,7.1) 5(-2.15,7.1) 6(-3.25,7.1) 7(-4.35,7.1) 8(-5.45,7.1) 9(-6.55,7.1)
  rect 1.6x1.4 smd: 10(-8,6.5) 11(6.85,6.5)
  rect 1.2x2.2 smd: 12(-7.75,-3.1) 13(7.75,-3.1)
TP4
  round 1 smd: 1(0,0)
TSSOP16-0P65-173
  rect 0.305x1.118 smd: 1(-2.275,-2.85) 2(-1.625,-2.85) 3(-0.975,-2.85) 4(-0.325,-2.85) 5(0.325,-2.85) 6(0.975,-2.85) 7(1.625,-2.85) 8(2.275,-2.85) 9(2.275,2.85) 10(1.625,2.85) 11(0.975,2.85) 12(0.325,2.85) 13(-0.325,2.85) 14(-0.975,2.85) 15(-1.625,2.85) 16(-2.275,2.85)
unnamed#2
  round 1.016 smd: 1(0,0)
USB_TPYEA_DUAL
  round 1.397 hole 0.889: A1(-1.3,3.5) A2(-1.3,1) A3(-1.3,-1) A4(-1.3,-3.5) B1(1.3,3.5) B2(1.3,1) B3(1.3,-1) B4(1.3,-3.5)
  round 3.353 hole 2.337: S1(1.65,6.5) S2(1.65,-6.5) S3(-4.15,6.5) S4(-4.15,-6.5)
USBMICRO_H
  round 0.61 hole 0.61 unplated: (-2,-1.264) (2,-1.264)
  rect 0.406x1.778 smd: 1(-1.3,0) 2(-0.65,0) 3(0,0) 4(0.65,0) 5(1.3,0)
  oval 1.016x1.778 hole 0.508x1.27: 6(-3.6,0.056) 7(3.6,0.056) 8(-3.6,-3.414) 9(3.6,-3.414)
  rect 1.118x1.016 smd: 10(-1.5,-4.564) 11(1.5,-4.564)
XH2_1X2_2P54MM
  oval 2.032x1.524 hole 1.016: 1(0,-1.27) 2(0,1.27)
XTAL3225M
  rect 1.2x1.2 smd: 1(-1.2,-0.95) 2(1.2,-0.95) 3(1.2,0.95) 4(-1.2,0.95)

## Nets
3.3V_PCIE: R72.1 U11.A9(+3_3V#A9) U11.A10(+3_3V#A10) U11.B8(+3_3V#B8)
3.3V_PCIE_AUX: R72.2 U11.B10(+3_3VAUX)
5V_HDMI: F2.2 J10.18(5V0) R62.2 R64.2
12V_PCIE: D5.A U11.A2(+12V#A2) U11.A3(+12V#A3) U11.B1(+12V#B1) U11.B2(+12V#B2) U11.B3(+12V#B3)
GND: C1.1 C2.1 C3.2 C4.1 C5.1 C6.2 C7.1 C8.1 C9.2 C10.2 C11.2 C12.2 C13.2 C14.2 C15.2 C16.2 C17.2 C18.2 C19.2 C20.2 C21.2 C22.2 C23.2 C24.2 C25.2 C26.2 C27.2 C28.2 C29.2 C30.2 C35.2 C36.2 C37.2 C38.2 C39.2 C40.2 C41.2 C42.2 C43.2 C44.2 C45.2 C46.2 C47.2 C52.2 C53.2 C54.2 C55.2 C56.2 C57.2 C58.2 C59.2 C66.2 C74.2 C75.2 C76.2 C77.2 C78.2 C79.2 C80.2 C81.2 C82.2 C83.2 C84.2 C85.2 C87.1 C88.1 C89.1 C90.1 C91.2 C92.1 C93.1 C96.1 C97.1 C98.1 C99.1 C100.1 C102.1 C103.1 C104.2 C105.2 C106.2 C108.2 C109.2 C110.2 C111.2 C112.2 C113.2 C114.2 C115.2 C116.2 C117.2 C118.2 C119.2 C120.2 C121.2 C122.2 D1.1 D2.1 D3.1 D4.1 D7.A J2.2 J2.10 J3.2 J4.5(GND) J4.6 J4.7 J4.8 J4.9 J4.10 J4.11 J5.6(VSS#6) J5.10(VSS#10) J5.11(VSS#11) J5.12(VSS#12) J5.13(VSS#13) J6.A4(GND1) J6.B4(GND2) J6.S1(SH1) J6.S2(SH2) J6.S3(SH3) J6.S4(SH4) J7.A4(GND1) J7.B4(GND2) J7.S1(SH1) J7.S2(SH2) J7.S3(SH3) J7.S4(SH4) J8.12(LED_G-) J10.2(D2S) J10.5(D1S) J10.8(D0S) J10.11(CLKS) J10.17(DCC/CECG) J10.BO1 J10.BO2 J10.BO3 J10.BO4 J11.1(GND#1) J11.3(GND#3) J11.9(GND#9) J11.15(GND#15) J11.21(GND#21) J11.27(GND#27) J11.33(GND#33) J11.39(GND#39) J11.45(GND#45) J11.51(GND#51) J11.57(GND#57) J11.71(GND#71) J11.73(GND#73) J11.75(GND#75) J12.1(VEET#1) J12.9(VEER#9) J12.10(VEER#10) J12.11(VEER#11) J12.14(VEER#14) J12.17(VEET#17) J12.20(VEET#20) J13.1(GND#1) J13.2(GND#2) J13.3(GND#3) J13.4(GND#4) J13.5(GND#5) J13.6(GND#6) J13.7(GND#7) J13.8(GND#8) J13.9(GND#9) J13.10(GND#10) J13.11(GND#11) J13.12(GND#12) J14.1(VEET#1) J14.9(VEER#9) J14.10(VEER#10) J14.11(VEER#11) J14.14(VEER#14) J14.17(VEET#17) J14.20(VEET#20) J15.12 J15.30 J16.12 J16.30 J18.2(GND2) J18.3(GND1) JM1.9 JM1.10 JM1.19 JM1.20 JM1.29 JM1.30 JM1.39 JM1.40 JM1.49 JM1.50 JM1.59 JM1.60 JM1.69 JM1.70 JM1.79 JM1.80 JM1.89 JM1.90 JM1.99 JM1.100 JM2.5 JM2.6 JM2.11 JM2.12 JM2.17 JM2.18 JM2.23 JM2.24 JM2.29 JM2.30 JM2.39 JM2.40 JM2.49 JM2.50 JM2.59 JM2.60 JM2.69 JM2.70 JM2.79 JM2.80 JM2.89 JM2.90 JM2.99 JM2.100 JM3.19 JM3.20 JM3.29 JM3.30 JM3.39 JM3.40 JM3.49 JM3.50 JM3.59 JM3.60 JM3.69 JM3.70 JM3.79 JM3.80 JM3.89 JM3.90 JM3.99 JM3.100 K1.1 K2.1 K3.1 M1.1 M2.1 M3.1 M4.1 M5.1 M6.1 M7.1 M8.1 M9.1 Q1.S Q5.2(E) R11.1 R18.1 R21.2 R22.2 R23.2 R24.2 R25.2 R28.1 R39.1 R59.1 R60.1 R63.1 R65.1 R66.2 R70.2 R71.1 R75.2 R76.2 R86.1 R108.2 R109.2 R112.2 R117.1 R118.1 R121.1 R179.1 R188.1 U1.3(GND) U1.29(PGND) U2.2(GND) U3.2(GND#2) U3.11(GND#11) U3.25(PGND) U4.37(VSS_PAD) U5.2(GND) U6.57(PAD) U7.65(EPAD) U10.3(GND#3) U10.8(GND#8) U11.A4(GND#A4) U11.A12(GND#A12) U11.A15(GND#A15) U11.A18(GND#A18) U11.B4(GND#B4) U11.B7(GND#B7) U11.B13(GND#B13) U11.B16(GND#B16) U11.B18(GND#B18) U12.7(GND) U13.3(GND) U15.2(PGND) U15.4(NC) U15.10(AGND) U16.4(GND#4) U16.6(GND#6) U17.4(GND#4) U17.6(GND#6) U18.4(GND#4) U18.6(GND#6) U19.3(GND#3) U19.8(GND#8) U20.3(GND#3) U20.8(GND#8) U21.3(GND#3) U21.8(GND#8) U22.3(GND#3) U22.8(GND#8) U23.2(GND) U28.3(GND#3) U28.8(GND#8) U29.3(GND#3) U29.8(GND#8) Y1.2(GND#2) Y1.4(GND#4) Y2.2(GND#2) Y2.4(GND#4)
VCC_1V0: C38.1 C39.1 C95.1 C98.2 C99.2 L2.2 R116.2 U6.6(DVDD#6) U6.42(DVDD#42) U16.5(VOUT)
VCC_1V8: B8.2 C10.1 C54.1 C55.1 C56.1 C94.1 C96.2 C97.2 L3.2 L9.2 L10.2 L11.2 R9.2 R82.2 R83.2 R84.2 R115.2 U3.5(VCCA) U17.5(VOUT)
VCC_3V3: B1.1 B2.1 B3.1 B9.2 B12.2 B13.2 B14.2 B15.2 B16.2 B17.2 C7.2 C8.2 C9.1 C11.1 C12.1 C13.1 C42.1 C43.1 C44.1 C57.1 C58.1 C59.1 C77.1 C78.1 C82.1 C84.1 C101.1 C102.2 C103.2 D8.A D9.A D10.A D11.A J5.4(VCC) J11.2(3.3V#2) J11.4(3.3V#4) J11.12(3.3V#12) J11.14(3.3V#14) J11.16(3.3V#16) J11.18(3.3V#18) J11.70(3.3V#70) J11.72(3.3V#72) J11.74(3.3V#74) J15.29 J16.29 L4.2 R13.2 R14.2 R19.2 R20.2 R30.2 R40.1 R41.1 R42.1 R46.1 R47.2 R48.2 R57.1 R58.1 R67.1 R68.1 R69.1 R80.2 R81.2 R85.2 R87.2 R88.2 R89.2 R90.2 R91.2 R92.2 R93.2 R94.2 R95.2 R96.2 R97.2 R98.2 R99.2 R119.2 R120.2 U3.17(VCCB1) U3.21(VCCB0) U4.5(VDDA33#5) U4.10(VDDA33#10) U4.15(VDD33#15) U4.23(VDD33#23) U4.29(VDDA33#29) U4.36(VDDA33#36) U6.10(VDDO_SEL) U6.11(VDDO#11) U6.49(VDDO#49) U6.52(VDDO#52) U7.29(DVDD_3V) U18.5(VOUT) U23.3(EN)
VCC_5V: C20.1 C22.1 C87.2 C88.2 C92.2 C93.2 C100.2 C109.1 F2.1 J15.11 J16.11 L1.2 R27.2 R113.2 R114.2 U5.1(IN) U15.5(VOUT) U16.2(VIN) U17.2(VIN) U18.2(VIN) U23.1(VIN)
VCC_12V: C1.2 C2.2 C89.2 C90.2 D6.A J3.1 JM3.1 JM3.2 JM3.3 JM3.4 JM3.5 JM3.6 JM3.7 JM3.8 Q3.D R106.1 U15.1(VIN)
VCC_MOD_3V3: C105.1 C106.1 D1.2 D2.2 D3.2 D4.2 J2.4 J2.6 JM3.11 JM3.13 R5.2 U2.3(VCCA)
VCC_UART_3V3: C3.1 R8.1 U1.6(VDD) U2.7(VCCB)
VCC_USB: B4.1 B5.1 B6.1 B7.1 C23.1 C24.1 C25.1 C26.1 R17.1 U5.6(OUT)
VCC_USB1: B4.2 C19.1 J6.A1(VBUS1)
VCC_USB2: B5.2 C21.1 J6.B1(VBUS2)
VCC_USB3: B6.2 C27.1 J7.A1(VBUS1)
VCC_USB4: B7.2 C28.1 J7.B1(VBUS2)
VDD_USB2UART_5V: C4.2 C5.2 J4.1(VDD) U1.7(REGIN) U1.8(VBUS)
7513_AVDD_1V8: C116.1 C117.1 C118.1 C119.1 L11.1 U7.15(AVDD#15) U7.19(AVDD#19) U7.25(AVDD#25)
7513_DVDD_1V8: C111.1 C112.1 C113.1 C114.1 C115.1 L10.1 U7.1(DVDD#1) U7.11(DVDD#11) U7.31(DVDD#31) U7.51(DVDD#51)
7513_PVDD_1V8: C120.1 C121.1 C122.1 L9.1 U7.12(PVDD) U7.13(BGVDD)
CEC: J10.13(CEC) U10.1(IN1) U10.10(OUT1)
CEC_CLK: R65.2 U7.32(CEC_CLK)
CEC_IO: R63.2 U7.30(CEC)
CLK_CP: C60.2 U11.A13(REFCLK+)
CLK_N: C61.2 U11.A14(REFCLK-)
CLKREQN: J11.52(CLKREQ#_3V3)
CON_SD_CLK: J5.5(CLK) R14.1 U3.19(CLKB0)
CON_SD_CMD: J5.3(CMD) R13.1 U3.20(CMDB0)
CON_SD_DATA0: J5.7(DAT0) U3.18(DATA0B0)
CON_SD_DATA1: J5.8(DAT1) U3.16(DATA1B0)
CON_SD_DATA2: J5.1(DAT2) U3.23(DATA2B0)
CON_SD_DATA3: J5.2(DAT3) U3.22(DATA3B0)
DDCSCL: J10.15(SCL) R62.1 U7.33(DDCSCL) U10.2(IN2) U10.9(OUT2)
DDCSDA: J10.16(SDA) R64.1 U7.34(DDCSDA) U10.4(IN3) U10.7(OUT3)
ETH0_MDI0_N: J8.3(MDI0-) JM3.84 U19.2(IN2) U19.9(OUT2)
ETH0_MDI0_P: J8.2(MDI0+) JM3.82 U19.1(IN1) U19.10(OUT1)
ETH0_MDI1_N: J8.7(MDI1-) JM3.88 U19.5(IN4) U19.6(OUT4)
ETH0_MDI1_P: J8.4(MDI1+) JM3.86 U19.4(IN3) U19.7(OUT3)
ETH0_MDI2_N: J8.6(MDI2-) JM3.94 U20.2(IN2) U20.9(OUT2)
ETH0_MDI2_P: J8.5(MDI2+) JM3.92 U20.1(IN1) U20.10(OUT1)
ETH0_MDI3_N: J8.9(MDI3-) JM3.98 U20.5(IN4) U20.6(OUT4)
ETH0_MDI3_P: J8.8(MDI3+) JM3.96 U20.4(IN3) U20.7(OUT3)
ETH1_25M_XI: C52.1 R61.1 U6.34(XTAL_IN) Y2.1(NC)
ETH1_25M_XO: C53.1 R61.2 U6.33(XTAL_OUT) Y2.3(OUT)
ETH1_MDI0_N: J9.3(MDI0-) U6.27(MDIN[0]) U21.2(IN2) U21.9(OUT2)
ETH1_MDI0_P: J9.2(MDI0+) U6.28(MDIP[0]) U21.1(IN1) U21.10(OUT1)
ETH1_MDI1_N: J9.7(MDI1-) U6.23(MDIN[1]) U21.5(IN4) U21.6(OUT4)
ETH1_MDI1_P: J9.4(MDI1+) U6.24(MDIP[1]) U21.4(IN3) U21.7(OUT3)
ETH1_MDI2_N: J9.6(MDI2-) U6.21(MDIN[2]) U22.2(IN2) U22.9(OUT2)
ETH1_MDI2_P: J9.5(MDI2+) U6.22(MDIP[2]) U22.1(IN1) U22.10(OUT1)
ETH1_MDI3_N: J9.9(MDI3-) U6.17(MDIN[3]) U22.5(IN4) U22.6(OUT4)
ETH1_MDI3_P: J9.8(MDI3+) U6.18(MDIP[3]) U22.4(IN3) U22.7(OUT3)
ETH1_NRST: JM2.35 R46.2 U6.16(RESETN)
ETH1_RGMII_MDC: JM2.31 U6.7(MDC)
ETH1_RGMII_MDIO: JM2.33 R57.2 U6.8(MDIO)
ETH1_RXCK: JM2.42 U6.46(RX_CLK)
ETH1_RXCTL: JM2.32 U6.43(RX_CTRL)
ETH1_RXD0: JM2.34 U6.44(RXD[0])
ETH1_RXD1: JM2.36 U6.45(RXD[1])
ETH1_RXD2: JM2.38 U6.47(RXD[2])
ETH1_RXD3: JM2.44 U6.48(RXD[3])
ETH1_TXCK: JM2.52 U6.53(TX_CLK)
ETH1_TXCTL: JM2.58 U6.56(TX_CTRL)
ETH1_TXD0: JM2.46 U6.50(TXD[0])
ETH1_TXD1: JM2.48 U6.51(TXD[1])
ETH1_TXD2: JM2.54 U6.54(TXD[2])
ETH1_TXD3: JM2.56 U6.55(TXD[3])
FPGA2M2_0_AC_N: C72.1 J11.47(PETN0/SATA-A-)
FPGA2M2_0_AC_P: C73.1 J11.49(PETP0/SATA-A+)
FPGA2M2_0_N: C72.2 JM2.25
FPGA2M2_0_P: C73.2 JM2.27
FPGA_TCK: D2.3 JM3.15 R2.1
FPGA_TDI: D4.3 JM3.21 R4.1
FPGA_TDO: D3.3 JM3.17 R3.1
FPGA_TMS: D1.3 JM3.23 R1.1
GPIO1_0N: J15.2 JM1.84
GPIO1_0P: J15.1 JM1.82
GPIO1_1N: J15.4 JM1.68
GPIO1_1P: J15.3 JM1.66
GPIO1_2N: J15.6 JM1.74
GPIO1_2P: J15.5 JM1.72
GPIO1_3N: J15.8 JM1.78
GPIO1_3P: J15.7 JM1.76
GPIO1_4N: J15.10 JM1.88
GPIO1_4P: J15.9 JM1.86
GPIO1_5N: J15.14 JM1.98
GPIO1_5P: J15.13 JM1.96
GPIO1_6N: J15.16 JM1.94
GPIO1_6P: J15.15 JM1.92
GPIO1_7N: J15.18 JM1.97
GPIO1_7P: J15.17 JM1.95
GPIO1_8N: J15.20 JM1.87
GPIO1_8P: J15.19 JM1.85
GPIO1_9N: J15.22 JM1.83
GPIO1_9P: J15.21 JM1.81
GPIO1_10N: J15.24 JM1.77
GPIO1_10P: J15.23 JM1.75
GPIO1_11N: J15.26 JM1.73
GPIO1_11P: J15.25 JM1.71
GPIO1_12N: J15.28 JM1.67
GPIO1_12P: J15.27 JM1.65
GPIO1_13N: J15.32 JM1.63
GPIO1_13P: J15.31 JM1.61
GPIO1_14N: J15.34 JM1.57
GPIO1_14P: J15.33 JM1.55
GPIO1_15N: J15.36 JM1.53
GPIO1_15P: J15.35 JM1.51
GPIO1_16N: J15.38 JM1.47
GPIO1_16P: J15.37 JM1.45
GPIO1_17N: J15.40 JM1.43
GPIO1_17P: J15.39 JM1.41
GPIO2_0N: J16.2 JM3.34
GPIO2_0P: J16.1 JM3.32
GPIO2_1N: J16.4 JM3.38
GPIO2_1P: J16.3 JM3.36
GPIO2_2N: J16.6 JM3.44
GPIO2_2P: J16.5 JM3.42
GPIO2_3N: J16.8 JM3.48
GPIO2_3P: J16.7 JM3.46
GPIO2_4N: J16.10 JM3.43
GPIO2_4P: J16.9 JM3.41
GPIO2_5N: J16.14 JM1.4
GPIO2_5P: J16.13 JM1.2
GPIO2_6N: J16.16 JM1.8
GPIO2_6P: J16.15 JM1.6
GPIO2_7N: J16.18 JM1.14
GPIO2_7P: J16.17 JM1.12
GPIO2_8N: J16.20 JM1.18
GPIO2_8P: J16.19 JM1.16
GPIO2_9N: J16.22 JM1.24
GPIO2_9P: J16.21 JM1.22
GPIO2_10N: J16.24 JM1.28
GPIO2_10P: J16.23 JM1.26
GPIO2_11N: J16.26 JM1.34
GPIO2_11P: J16.25 JM1.32
GPIO2_12N: J16.28 JM1.38
GPIO2_12P: J16.27 JM1.36
GPIO2_13N: J16.32 JM1.44
GPIO2_13P: J16.31 JM1.42
GPIO2_14N: J16.34 JM1.48
GPIO2_14P: J16.33 JM1.46
GPIO2_15N: J16.36 JM1.54
GPIO2_15P: J16.35 JM1.52
GPIO2_16N: J16.38 JM1.58
GPIO2_16P: J16.37 JM1.56
GPIO2_17N: J16.40 JM1.64
GPIO2_17P: J16.39 JM1.62
HDMI_HPD: J10.19(HPD) R66.1 U7.16(HPD) U10.5(IN4) U10.6(OUT4)
HDMI_I2S0: JM3.35 U7.5(I2S0)
HDMI_LRCLK: JM3.31 U7.10(LRCLK)
HDMI_MCLK: JM3.37 U7.4(MCLK)
HDMI_SCL: JM2.64 R68.2 U7.35(SCL)
HDMI_SCLK: JM3.33 U7.9(SCLK)
HDMI_SDA: JM2.66 R69.2 U7.36(SDA)
HDMI_TX_CLK: JM2.81 U7.53(CLK)
HDMI_TX_D0: JM2.61 U7.62(D0)
HDMI_TX_D1: JM2.63 U7.61(D1)
HDMI_TX_D2: JM2.65 U7.60(D2)
HDMI_TX_D3: JM2.67 U7.59(D3)
HDMI_TX_D4: JM2.71 U7.58(D4)
HDMI_TX_D5: JM2.73 U7.57(D5)
HDMI_TX_D6: JM2.75 U7.56(D6)
HDMI_TX_D7: JM2.77 U7.55(D7)
HDMI_TX_D8: JM2.83 U7.54(D8)
HDMI_TX_D9: JM2.85 U7.52(D9)
HDMI_TX_D10: JM2.87 U7.50(D10)
HDMI_TX_D11: JM2.98 U7.49(D11)
HDMI_TX_D12: JM2.96 U7.48(D12)
HDMI_TX_D13: JM2.94 U7.47(D13)
HDMI_TX_D14: JM2.92 U7.46(D14)
HDMI_TX_D15: JM2.88 U7.45(D15)
HDMI_TX_D16: JM2.86 U7.44(D16)
HDMI_TX_D17: JM2.84 U7.43(D17)
HDMI_TX_D18: JM2.82 U7.42(D18)
HDMI_TX_D19: JM2.78 U7.41(D19)
HDMI_TX_D20: JM2.76 U7.40(D20)
HDMI_TX_D21: JM2.74 U7.39(D21)
HDMI_TX_D22: JM2.72 U7.38(D22)
HDMI_TX_D23: JM2.68 U7.37(D23)
HDMI_TX_DE: JM2.57 U7.63(DE)
HDMI_TX_HS: JM2.55 U7.64(HSYNC)
HDMI_TX_INT: JM2.62 R67.2 U7.28(INT)
HDMI_TX_SPDIF: JM2.51 U7.3(SPDIF)
HDMI_TX_VS: JM2.53 U7.2(VSYNC)
M2_PERSTN: JM2.41 Q1.G R86.2
M2_PPEDET: J11.69(PEDET/PCIE-NC) JM2.43 R87.1
M2_REFCLK_N: J11.53(REFCLKN) R74.2 R75.1
M2_REFCLK_P: J11.55(REFCLKP) R73.2 R76.1
M22FPGA_0_N: J11.41(PERN0/SATA-B+) JM2.26
M22FPGA_0_P: J11.43(PERP0/SATA-B-) JM2.28
MGT_CLK1_N: C67.1 JM2.2 R186.2
MGT_CLK1_P: C70.1 JM2.4 R186.1
MIO11: JM3.65
MIO12: JM3.67
MIO13: JM3.71
NC1: U12.1
NC2: U12.2
NC3: U12.3
NC4: U12.4
NC5: U12.5
NC6: U12.8
NC7: U12.9
NC8: U12.12
NC9: U12.13
NRSTIN: JM3.16 R43.1
PCIE_CLK_N: C61.1 C69.1 JM2.1
PCIE_CLK_P: C60.1 C68.1 JM2.3
PCIE_PERSTN: JM2.45 U11.A11(PERST_N)
PCIE_PRSNTN_X1: U11.A1(PRSNT1_N) U11.B17(PRSNT2_N_X1)
PCIE_RX_N: JM2.8 U11.B15(PET0N)
PCIE_RX_P: JM2.10 U11.B14(PET0P)
PCIE_TX_CN: C63.2 U11.A17(PER0N)
PCIE_TX_CP: C62.2 U11.A16(PER0P)
PCIE_TX_N: C63.1 JM2.7
PCIE_TX_P: C62.1 JM2.9
PG_1V0: R114.1 U16.1(PG)
PG_1V8: R113.1 R184.1 U17.1(PG)
PG_3V3: R111.1 R119.1 U18.1(PG)
PG_5V: R110.2 U15.3(PG) U16.8(EN) U17.8(EN)
PG_MOD: JM3.14 R185.1
PHY0_LED0: J8.13(LED_Y-) JM3.78
PHY0_LED1: JM3.76 R29.2
PHY1_LED0: J9.13(LED_Y-) U6.14(LED[0])
PHY1_LED1: J9.12(LED_G-) U6.13(LED[1])
PHY_AVDDH3V3: B9.1 C45.1 C46.1 U6.20(AVDD33#20) U6.25(AVDD33#25)
PHY_AVDDL1V8: B8.1 C40.1 C41.1 U6.3(AVDD18#3) U6.19(AVDD18#19) U6.26(AVDD18#26) U6.35(AVDDC18) U6.38(AVDD18#38)
PL_KEY: JM2.47 R45.1
PL_LED1: JM2.95 R181.1
PL_LED2: JM2.97 R182.1
PL_LED3: JM2.37 R183.1
PS_KEY: JM3.61 R44.1
PS_LED: JM3.63 R180.1
PWR_EN: JM3.12
SD_CLK: JM3.73 U3.9(CLKA)
SD_CMD: JM3.75 U3.4(CMDA)
SD_DATA0: JM3.77 U3.6(DATA0A)
SD_DATA1: JM3.81 U3.7(DATA1A)
SD_DATA2: JM3.83 U3.1(DATA2A)
SD_DATA3: JM3.85 U3.3(DATA3A)
SFP1_PRSNTN: J12.6(MOD-DEF0) JM1.15 R93.1
SFP1_RX_N: J12.12(RD-) JM2.20
SFP1_RX_P: J12.13(RD+) JM2.22
SFP1_RXLOS: J12.8(RX_LOS) JM1.17 R89.1
SFP1_SCL: J12.5(MOD-DEF1) JM1.7 R92.1
SFP1_SDA: J12.4(MOD-DEF2) JM1.5 R91.1
SFP1_TX_N: J12.19(TD-) JM2.19
SFP1_TX_P: J12.18(TD+) JM2.21
SFP1_TXDISABLE: J12.3(TX_DISABLE) JM1.3 R88.1
SFP1_TXFAULT: J12.2(TX_FAULT) JM1.1 R90.1
SFP2_PRSNTN: J14.6(MOD-DEF0) JM1.31 R99.1
SFP2_RX_N: J14.12(RD-) JM2.14
SFP2_RX_P: J14.13(RD+) JM2.16
SFP2_RXLOS: J14.8(RX_LOS) JM1.33 R95.1
SFP2_SCL: J14.5(MOD-DEF1) JM1.27 R98.1
SFP2_SDA: J14.4(MOD-DEF2) JM1.25 R97.1
SFP2_TX_N: J14.19(TD-) JM2.13
SFP2_TX_P: J14.18(TD+) JM2.15
SFP2_TXDISABLE: J14.3(TX_DISABLE) JM1.23 R94.1
SFP2_TXFAULT: J14.2(TX_FAULT) JM1.21 R96.1
SUSCLK: J11.68(SUSCLK_O_3P3)
TMDS_TX0_N: J10.9(D0-) U7.20(TX0-) U28.2(IN2) U28.9(OUT2)
TMDS_TX0_P: J10.7(D0+) U7.21(TX0+) U28.1(IN1) U28.10(OUT1)
TMDS_TX1_N: J10.6(D1-) U7.23(TX1-) U29.5(IN4) U29.6(OUT4)
TMDS_TX1_P: J10.4(D1+) U7.24(TX1+) U29.4(IN3) U29.7(OUT3)
TMDS_TX2_N: J10.3(D2-) U7.26(TX2-) U29.2(IN2) U29.9(OUT2)
TMDS_TX2_P: J10.1(D2+) U7.27(TX2+) U29.1(IN1) U29.10(OUT1)
TMDS_TXC_N: J10.12(CLK-) U7.17(TXC-) U28.5(IN4) U28.6(OUT4)
TMDS_TXC_P: J10.10(CLK+) U7.18(TXC+) U28.4(IN3) U28.7(OUT3)
UART_RX: JM3.72 R178.2 U2.5(A1)
UART_TX: JM3.74 R177.2 U2.4(A2)
USB2UART_DM: R6.2 U1.5(DM)
USB2UART_DP: R7.2 U1.4(DP)
USB_OTG_CPEN: JM3.87 U5.3(EN)
USB_OTG_ID: JM3.95 R18.2
USB_OTG_N: JM3.93 U4.30(DM_UP)
USB_OTG_P: JM3.91 U4.31(DP_UP)
USB_VBUS: JM3.97 R17.2
VIOTA: B1.2 B18.2 JM1.91 JM1.93
VIOTB: B2.2 JM1.11 JM1.13
VIOTC: B3.2 JM2.91 JM2.93
WAKEN: J11.54(PEWAKE#_3V3)
WARM_NRST: JM3.18
XADC_VN: JM3.68
XADC_VP: JM3.66
N18052616: R9.1 R11.2 U3.24(SEL)
N18052688: C6.1 R8.2 U1.9(\\R\S\T)
N18052739: R177.1 U1.25(RXD) U2.1(B2)
N18052741: R178.1 U1.26(TXD) U2.8(B1)
N18052765: R5.1 U2.6(OE)
N18052822: J4.3(DP) R7.1
N18052826: J4.2(DM) R6.1
N18053090: J5.9(CD) TP1.1
N18054364: C17.1 R26.1 U4.33(XTALIN/CLKIN) Y1.1(NC)
N18054368: C18.1 R26.2 U4.32(XTALOUT) Y1.3(OUT)
N18054403: R28.2 U5.5(ILIM)
N18054708: R19.1 U4.27(VBUS_DET)
N18054710: C14.1 R20.1 U4.26(RESET_N)
N18054724: R21.1 U4.35(RBIAS)
N18054758: R23.1 U4.22(SDA/SMBDATA/NON_REM1)
N18054760: R22.1 U4.28(SUSP_IND/LOCAL_PWR/NON_REM0)
N18054764: R25.1 U4.25(HS_IND/CFG_SEL1)
N18054766: R24.1 U4.24(SCL/SMBCLK/CFG_SEL0)
N18054816: C15.1 U4.34(PLLFILT)
N18054820: C16.1 U4.14(CRFILT)
N18054871: J6.A2(D1-) U4.1(DN1)
N18054877: J6.B2(D2-) U4.3(DN2)
N18054879: J6.A3(D1+) U4.2(DP1)
N18054885: J7.A3(D1+) U4.7(DP3)
N18054887: J6.B3(D2+) U4.4(DP2)
N18054897: J7.A2(D1-) U4.6(DN3)
N18054907: J7.B2(D2-) U4.8(DN4)
N18054909: J7.B3(D2+) U4.9(DP4)
N18055271: R27.1 U5.4(FAULT)
N18056015: J8.11(LED_G+) R29.1
N18056039: J8.14(LED_Y+) R30.1
N18056049: C30.1 J8.10(PGND) J8.15(SHIELD1) J8.16(SHIELD2) R39.2
N18056093: C35.1 K1.2 R41.2 R43.2
N18056212: C36.1 K2.2 R40.2 R44.2
N18056342: C29.1 J8.1(CT)
N18057573: J9.14(LED_Y+) R48.1
N18057575: J9.11(LED_G+) R47.1
N18057588: C104.1 J9.10(PGND) J9.15(SHIELD1) J9.16(SHIELD2) R179.2
N18057830: R58.2 R60.2 U6.15(CONFIG)
N18057881: C47.1 J9.1(CT)
N18058141: R59.2 U6.30(RSET)
N18058952: F1.1 J18.1(VCC)
N18070154: B14.1 C74.1 C75.1 J12.16(VCCT)
N18070202: B15.1 C76.1 C79.1 J12.15(VCCR)
N18072384: B16.1 C80.1 C81.1 J14.16(VCCT)
N18072420: B17.1 C83.1 C85.1 J14.15(VCCR)
N18080771: C94.2 R115.1 R118.2 U17.7(FB)
N18080863: L3.1 U17.3(SW)
N18080938: C95.2 R116.1 R117.2 U16.7(FB)
N18081069: L2.1 U16.3(SW)
N18081721: R106.2 R109.1 U15.11(EN)
N18081879: R100.1 U15.8(BST)
N18081884: C86.2 R100.2
N18081899: C86.1 L1.1 U15.7(SW)
N18082651: C91.1 R110.1 U15.9(VCC)
N18101823: R70.1 U7.14(R_EXT)
N18121292: R71.2 U7.22(PD)
N18227935: J11.50(PERST#_3V3) Q1.D R85.1
N18228207: J11.10(DAS/DSS#_OD) R80.1
N18228255: J11.38(DEVSLP_O) R81.1
N18228267: J11.40(SMB_CLK_1V8) R82.1
N18228287: J11.42(SMB_DATA_1V8) R83.1
N18228291: J11.44(ALERT#_1V8) R84.1
N18236382: C70.2 U13.4(CLKP)
N18236386: C67.2 U13.5(CLKN)
N18236420: B13.1 C66.1 U13.1(OE) U13.6(VDD)
N18252385: C37.1 K3.2 R42.2 R45.2
N18395071: R184.2 R185.2 U18.8(EN)
N18395099: C101.2 R120.1 R121.2 U18.7(FB)
N18395188: L4.1 U18.3(SW)
N18395932: D7.K R102.2 R105.1
N18395945: Q3.G Q4.3(COLLECTOR) R103.2 R104.2 SW2.2 SW2.5
N18395979: R104.1 R112.1 SW2.1 SW2.4
N18396043: D6.K R107.1
N18396075: Q2.G R101.2 R108.1
N18396077: Q5.1(B) R111.2
N18396081: Q5.3(C) R107.2
N18396093: D5.K Q2.S Q3.S Q4.2(EMITTER) R101.1 R102.1 R103.1
N18396139: Q4.1(BASE) R105.2
N18396348: F1.2 Q2.D
N18436851: B18.1 C108.1 U23.5(VOUT)
N18482641: J2.5 R1.2
N18482654: J2.1 R2.2
N18482672: J2.3 R3.2
N18482680: J2.9 R4.2
N18483477: R73.1 U12.15(CLK0+)
N18483479: R74.1 U12.14(CLK0-)
N18483543: B12.1 C110.1 J19.1 U12.16(VDD)
N18488589: R78.2 U12.10(CLK1+)
N18488591: R79.2 U12.11(CLK1-)
N18488615: C68.2 R78.1
N18488617: C69.2 R79.1
N18489511: R187.2 U12.6(OE)
N18543575: J19.2 R187.1 R188.2
N184222541: D8.K R180.2
N184223201: D9.K R181.2
N184223891: D10.K R182.2
N184235350: D11.K R183.2

Pads without a net: J2 7 8; J4 4; J10 14; J11 5 6 7 8 11 13 17 19 20 22 23 24 25 26 28 29 30 31 32 34 35 36 37 46 48 56 58 67; J12 7; J14 7; JM1 35 37; JM3 9 10 22 24 25 26 27 28 45 47 51 52 53 54 55 56 57 58 62 64; NOREF#15 1; NOREF#16 1; NOREF#19 1; NOREF#20 1; NOREF#21 1; NOREF#22 1; SW2 3 6; U1 1 2 10 11 12 13 14 15 16 17 18 19 20 21 22 23 24 27 28; U3 8 10 12 13 14 15; U4 11 12 13 16 17 18 19 20 21; U6 1 2 4 5 9 12 29 31 32 36 37 39 40 41; U7 6 7 8; U11 A5 A6 A7 A8 B5 B6 B9 B11 B12; U13 2; U15 6 12; U23 4

## Routing (per net, layer and track width the routed paths; a pad name or vN(x,y) marks a point on that pad's centre or on a via; arc(x,y) is an arc through that point)
3.3V_PCIE_AUX: length 1.4
  BOTTOM w0.508: R72.2 54.86,11.39
